# Altium PCB Capybara.PcbDoc (part 1 of 5)
Units mil, origin at the board's own origin, x right, y up, seen from the top; angles counter-clockwise.
Board outline 2270 x 2270 mil, 4 copper layers (Top Layer, GND, Signal, Bottom Layer), stack 61.8 mil thick; 394 components, 234 nets, 1155 pads, 211 vias.
Unrouted connection lines stored in the file: 4.
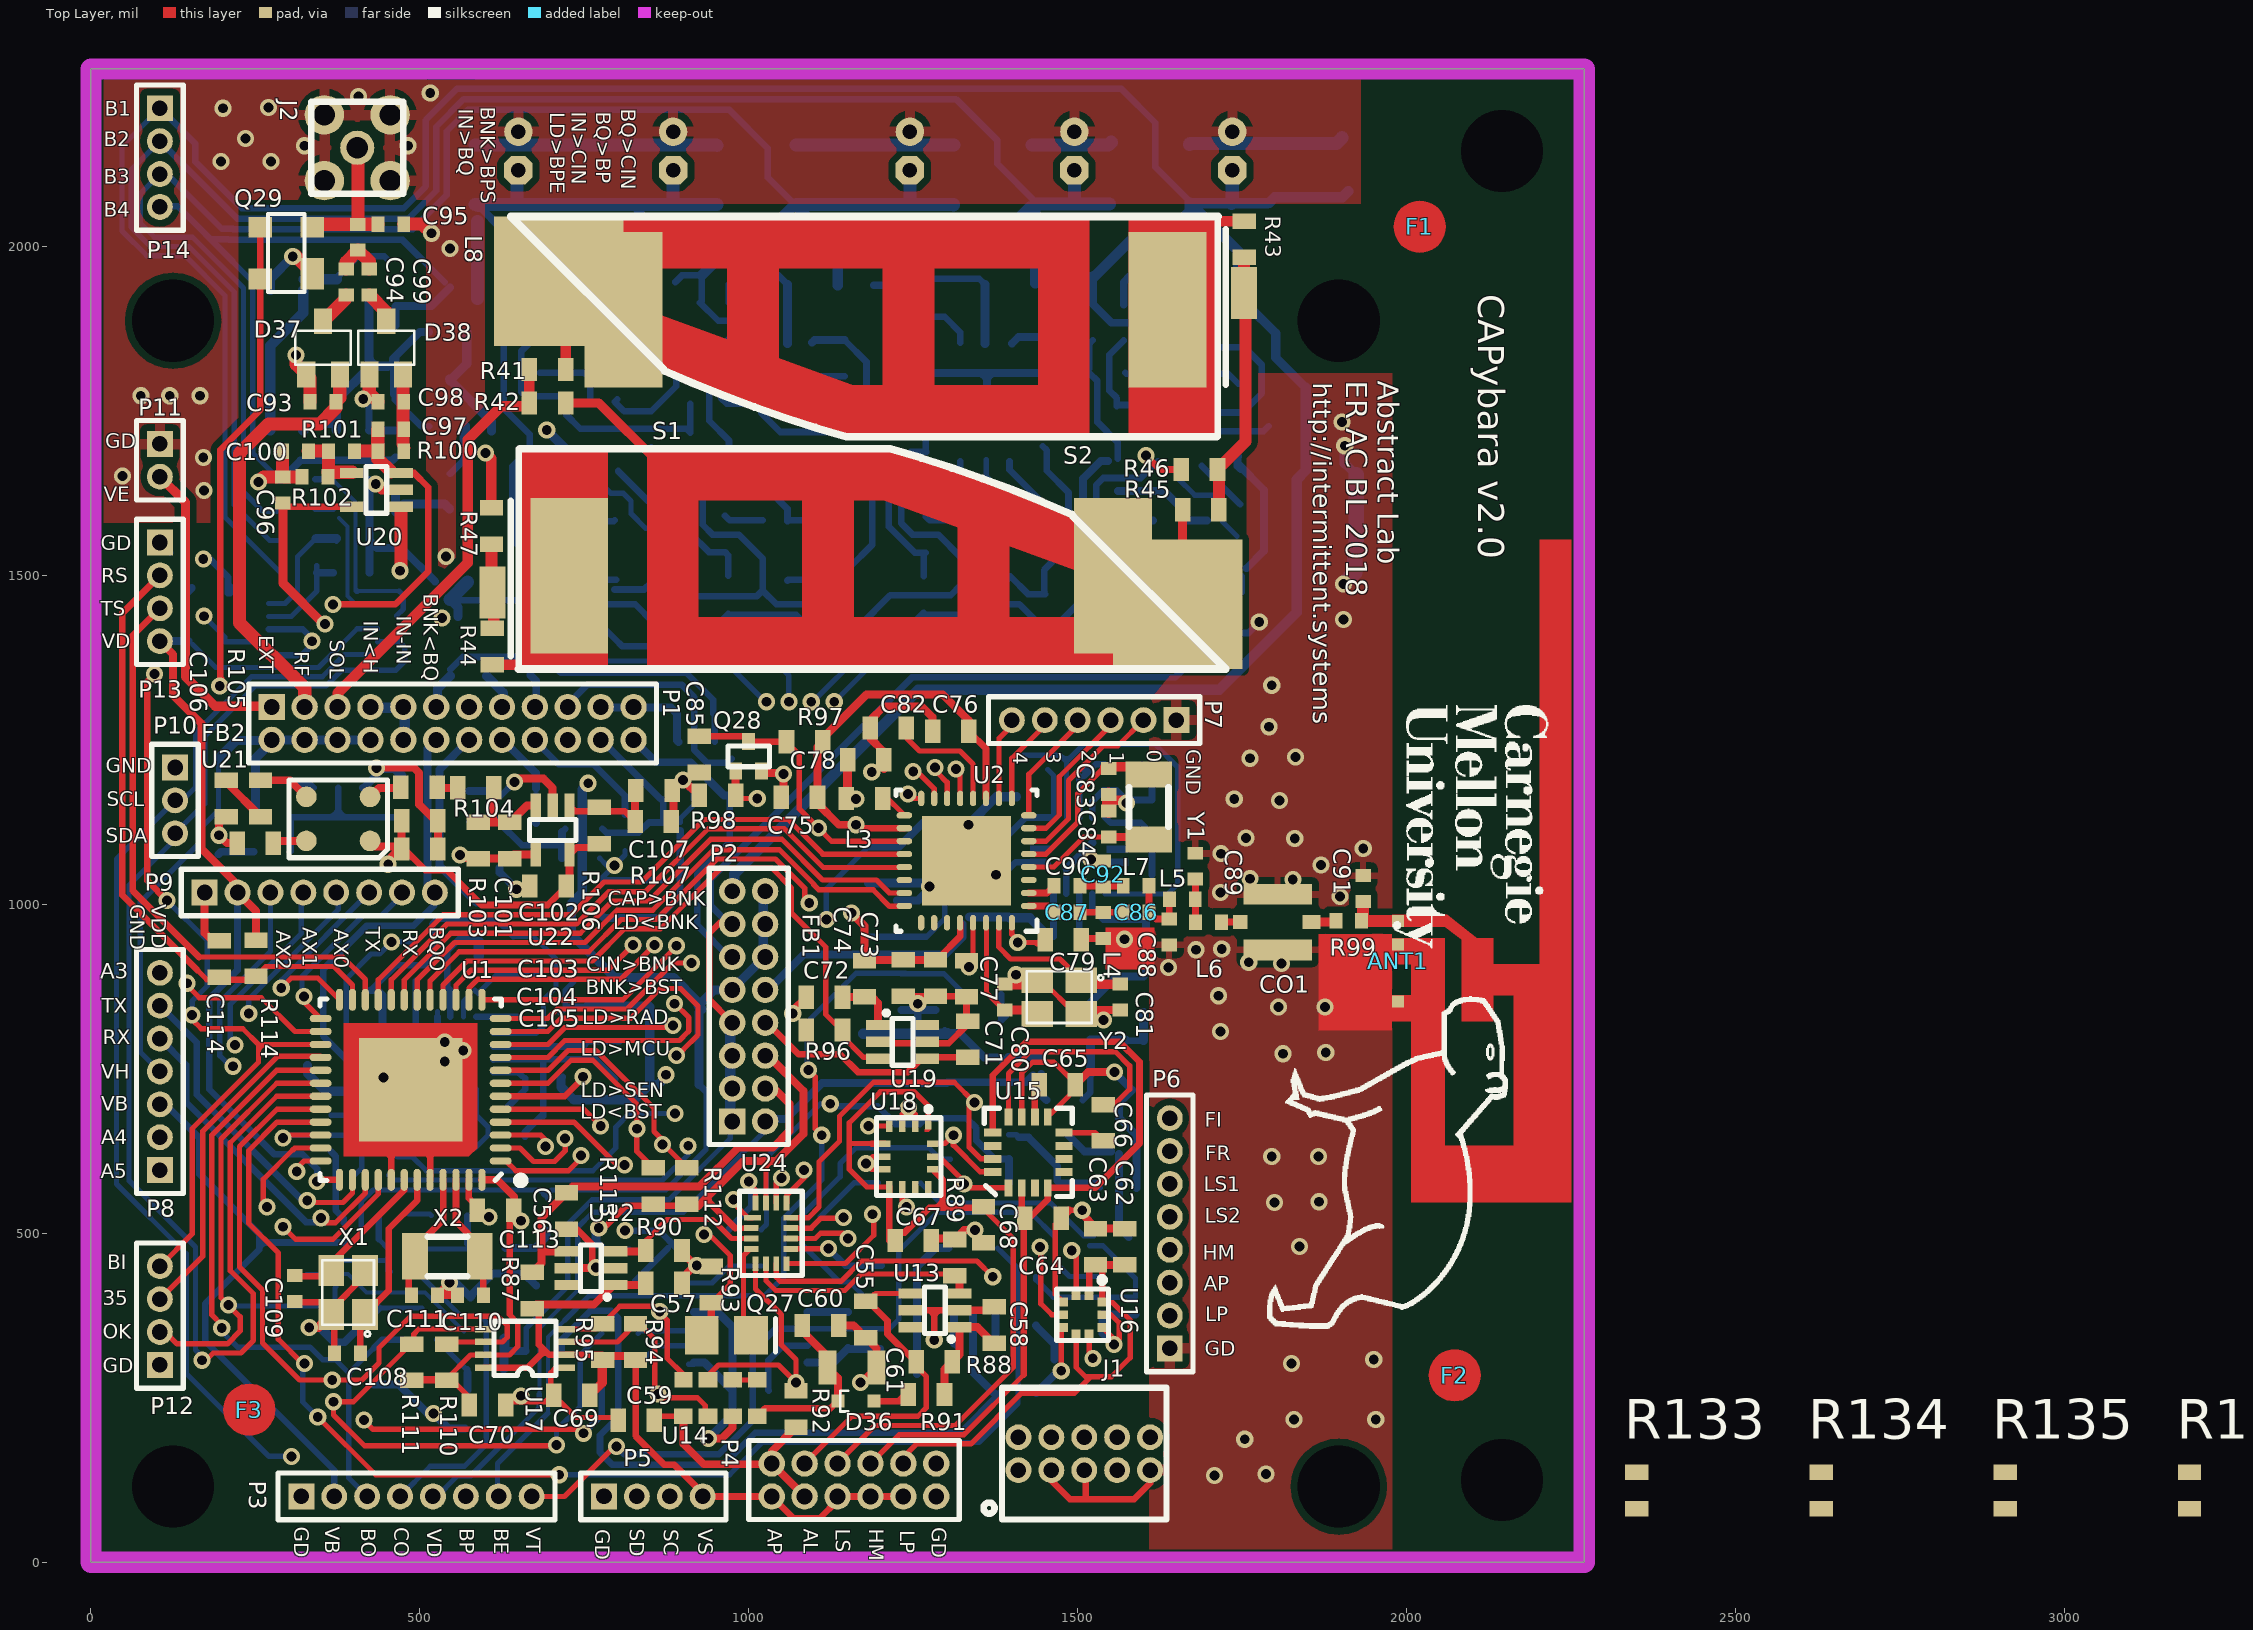
[diagram p0: Top Layer view]
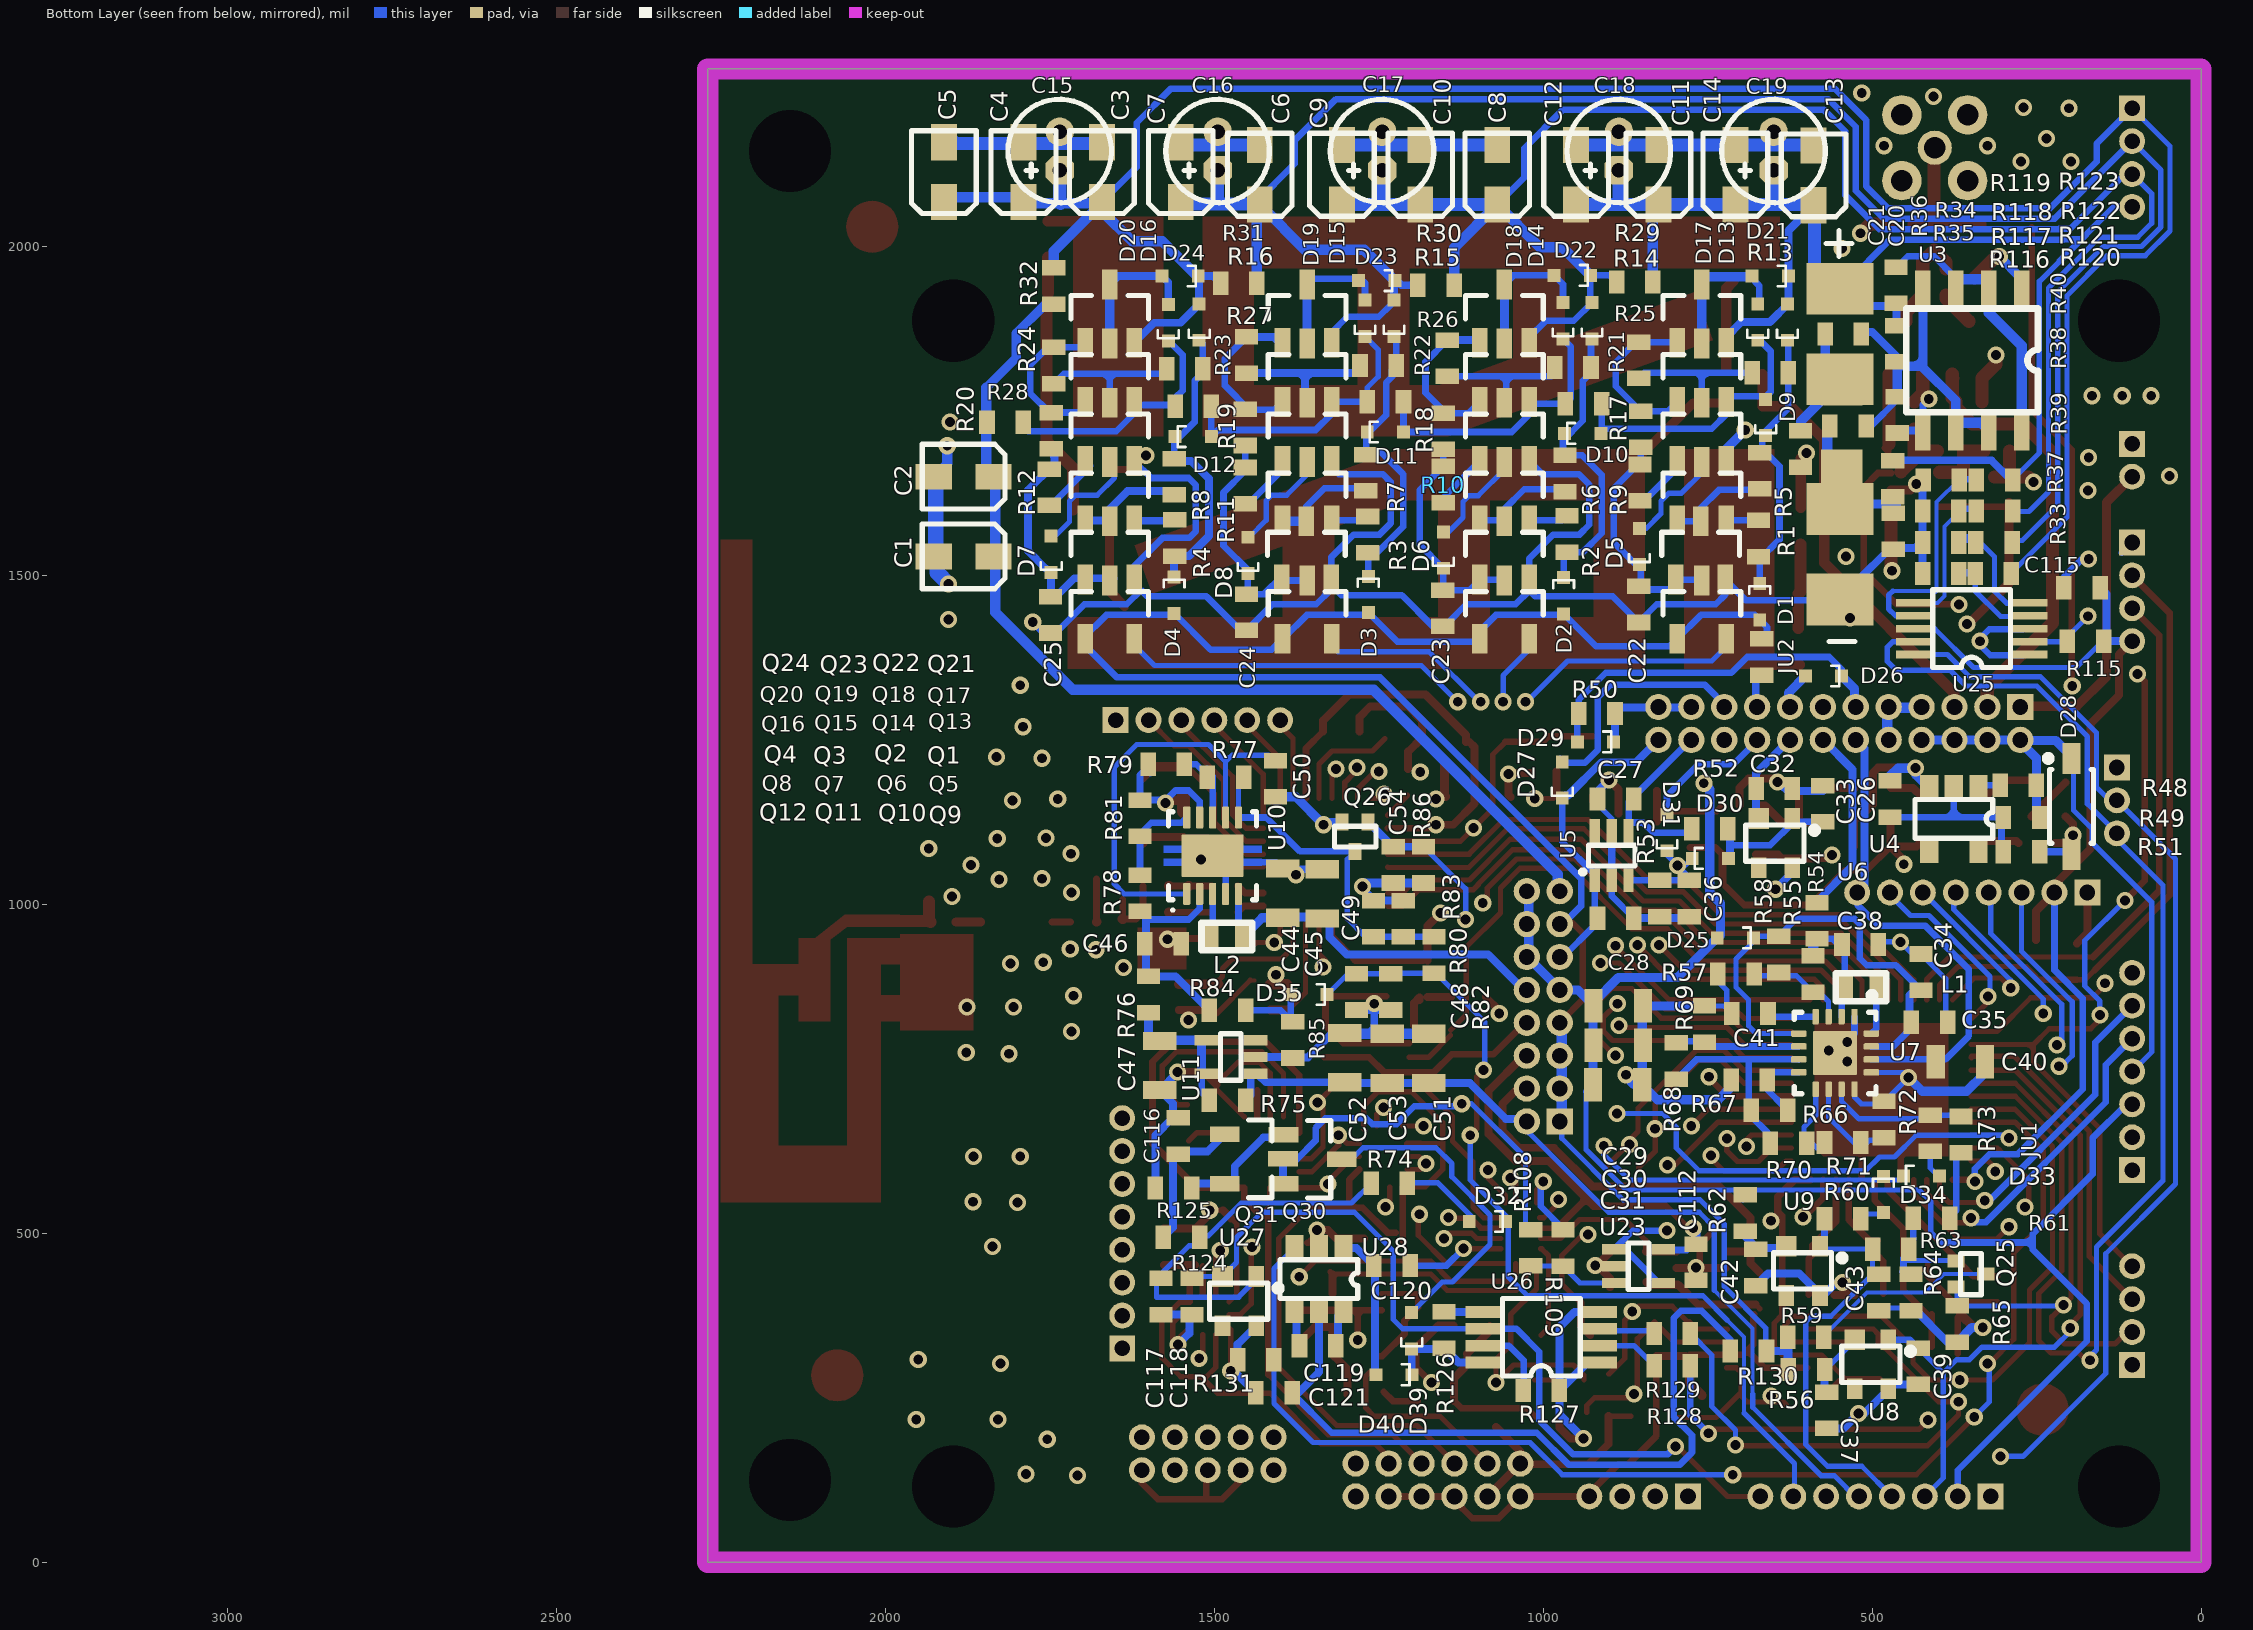
[diagram p1: Bottom Layer view, seen from below]
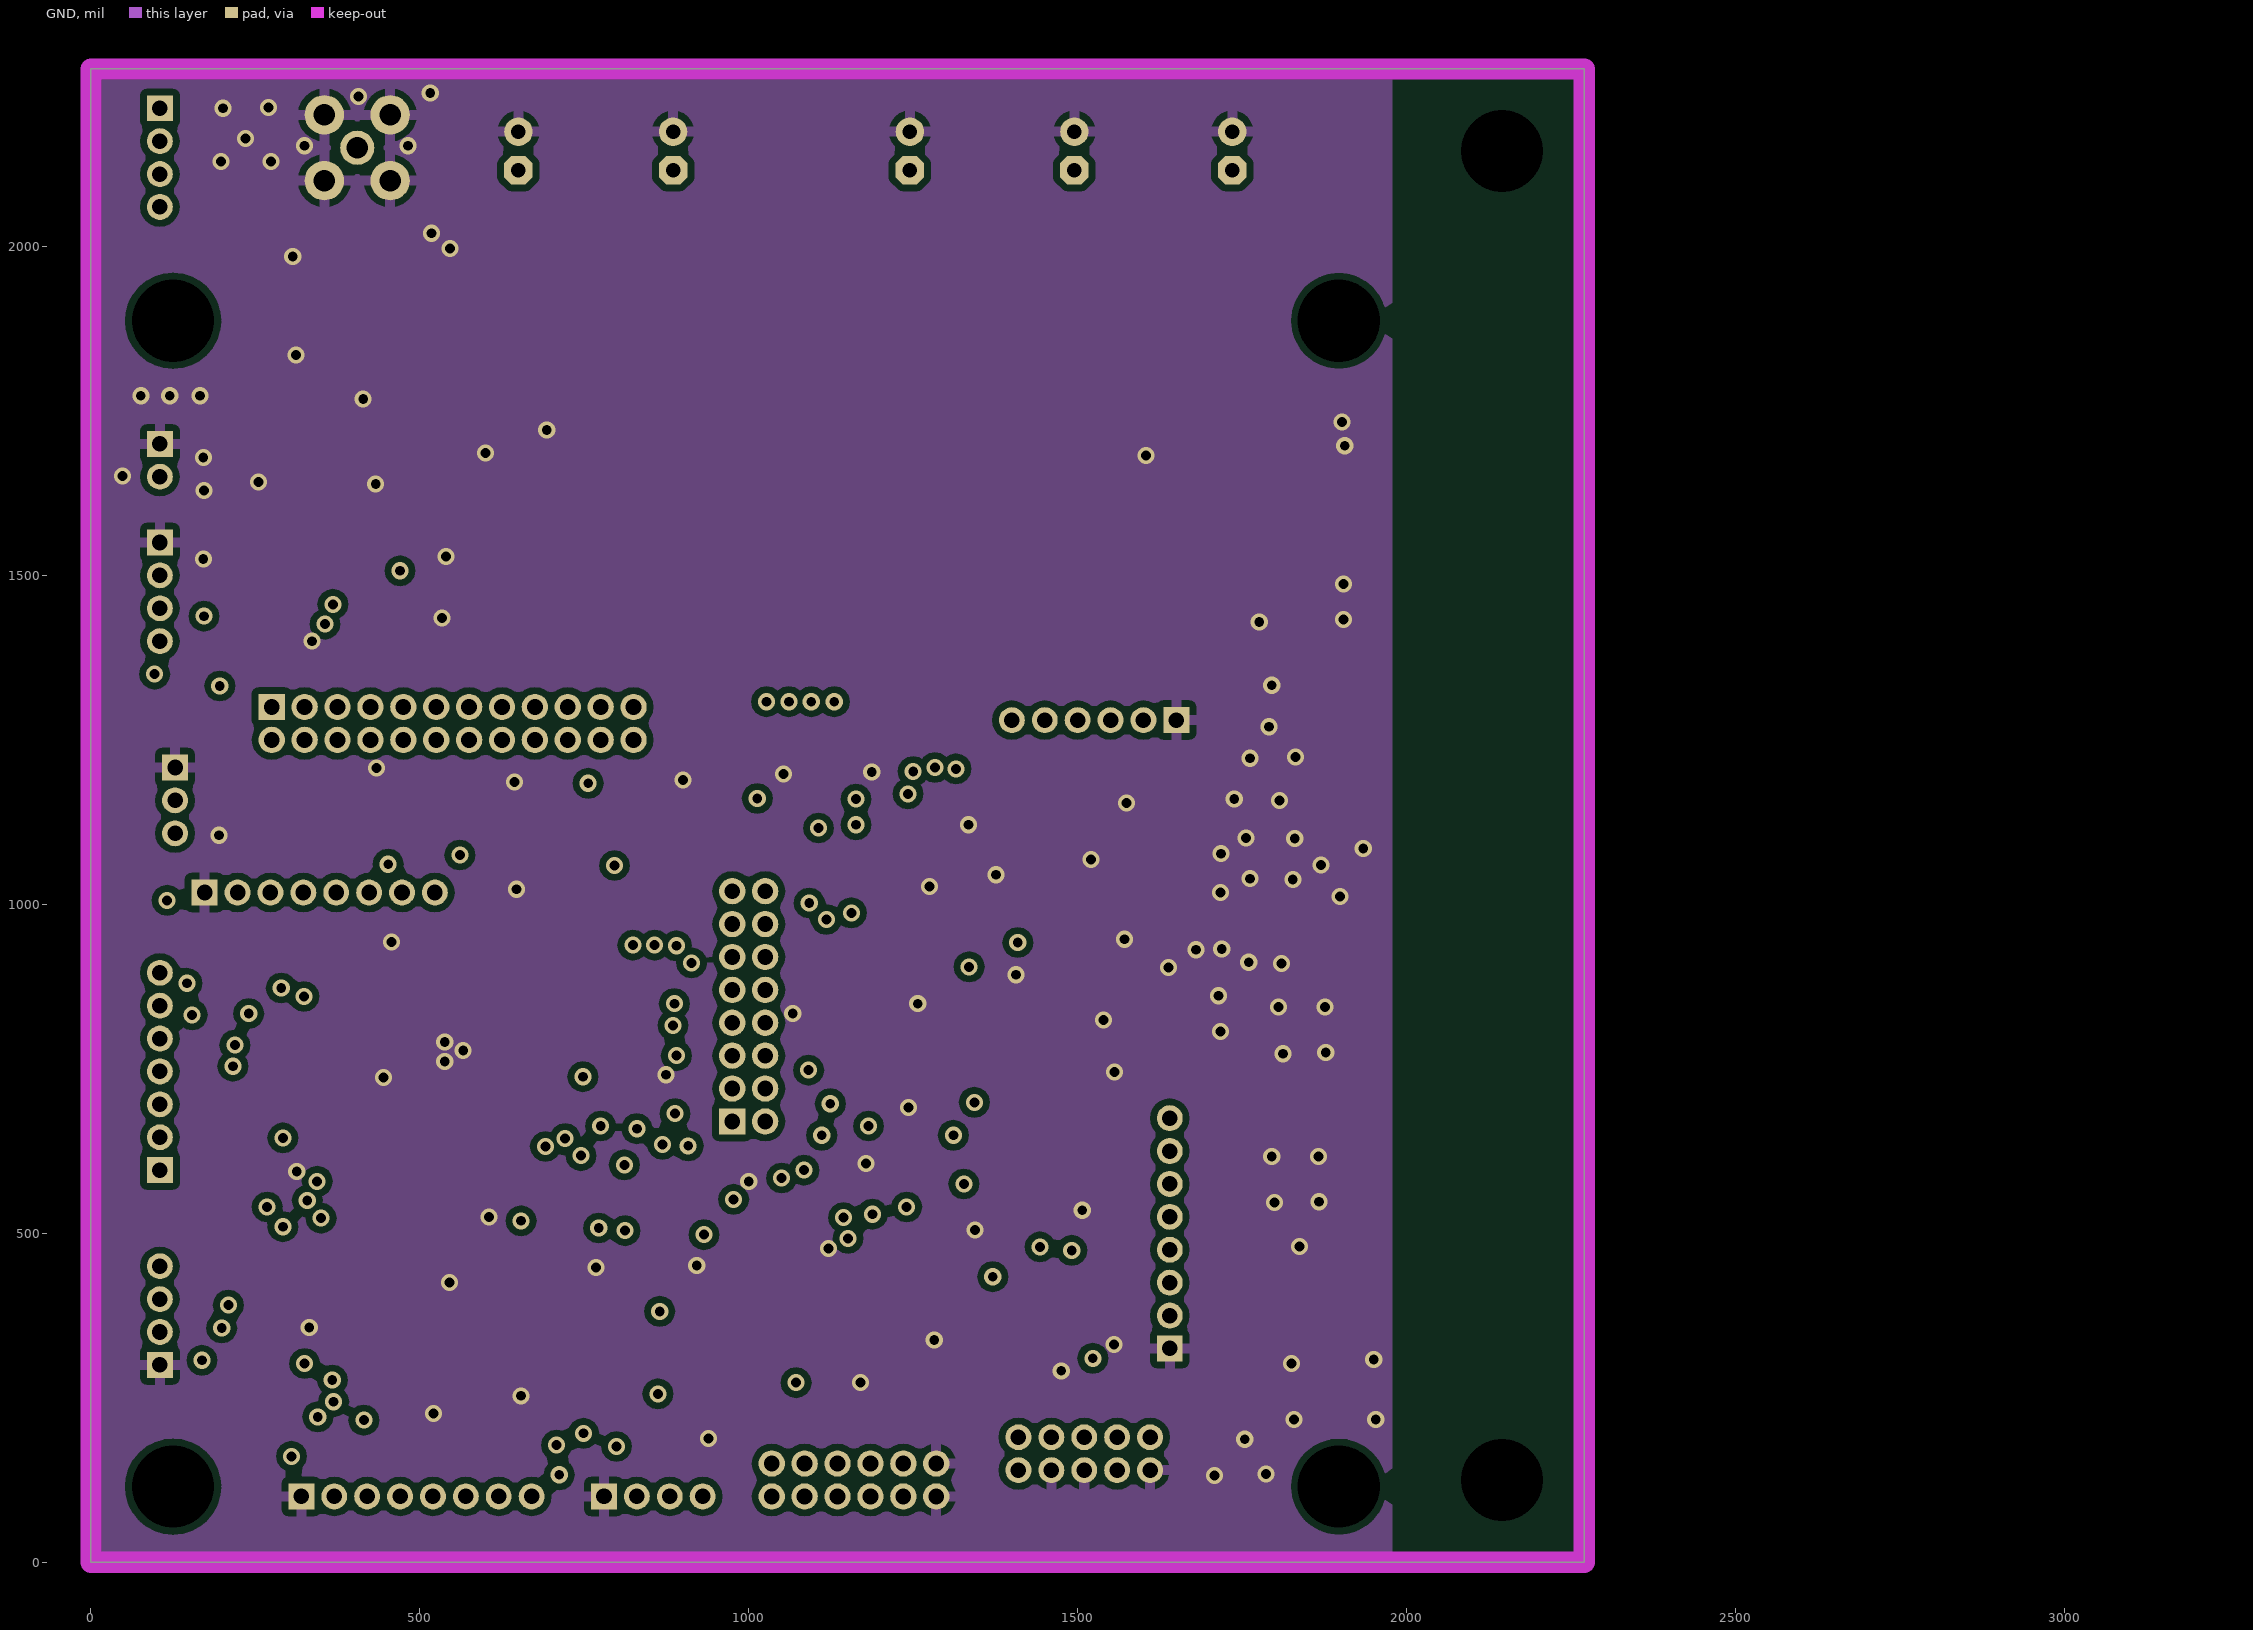
[diagram p2: GND]
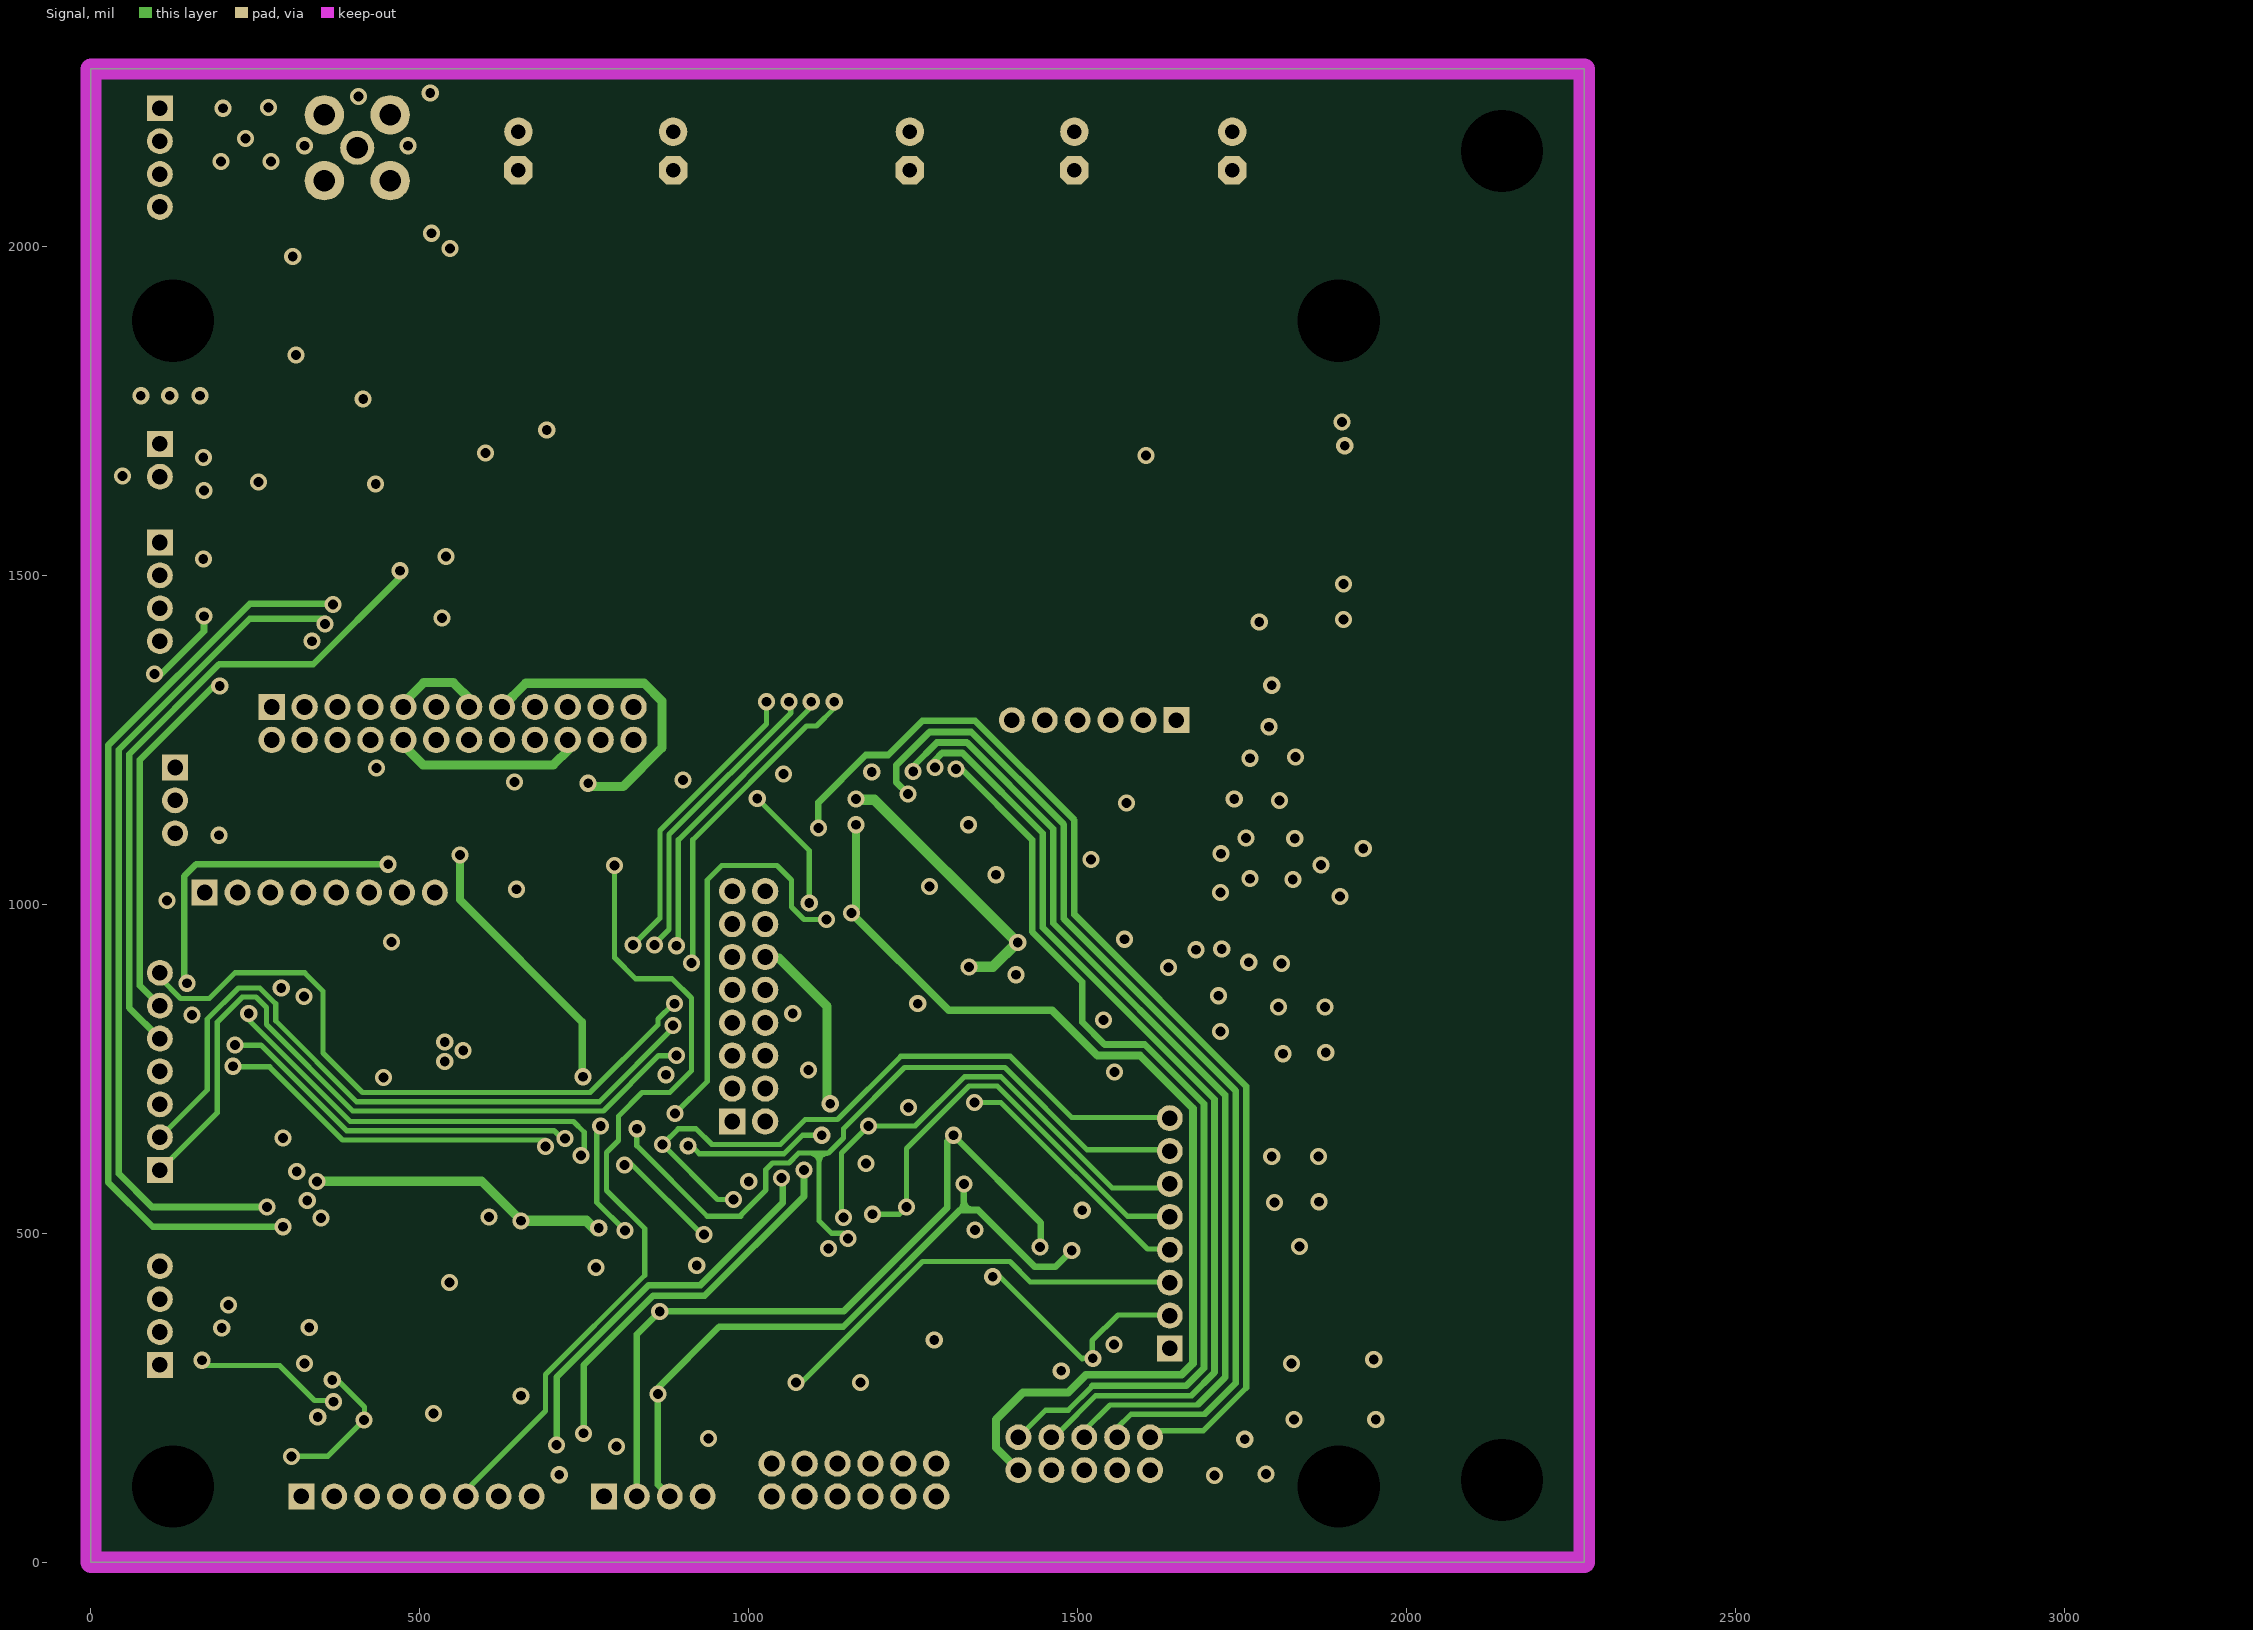
[diagram p3: Signal]

## Layer stack, top to bottom
Top Solder: solder mask 1, Solder Resist, Dk 3.5
Top Layer: signal copper 1.4
Dielectric 1: prepreg 14.1, FR408, Dk 4.5
GND: signal copper 1.4
Dielectric 3: core 28, FR408, Dk 4.5
Signal: signal copper 1.4
Dielectric 2: prepreg 14.1, FR408, Dk 4.5
Bottom Layer: signal copper 1.4
Bottom Solder: solder mask 1, Solder Resist, Dk 3.5

## Board outline
0,0 2270,0 2270,2270 0,2270

## Design rules (kind name [scope] priority, off if disabled: settings)
Clearance Clearance_keepout [OnLayer('Keep-Out Layer')] p1: gap=0 ignorepadtopadclearanceinfootprint=TRUE // Clearance for polygon wrt keepout layer
Clearance [InNamedPolygon('GND')] p2: gap=10 ignorepadtopadclearanceinfootprint=TRUE except(0: Arc-Hole Track-Hole SMDPad-Hole THPad-Hole Via-Hole Fill-Hole Poly-Hole Region-Hole Text-Hole)
Clearance "Clearance~Sunstone Circuits" [All] p3: gap=6 ignorepadtopadclearanceinfootprint=FALSE except(0: SMDPad-Hole THPad-Hole Via-Hole Fill-Hole Poly-Hole Region-Hole Text-Hole; 10: Arc-Hole Track-Hole) // Sunstone Circuits Minimum Clearance Rule (MLB~4&6 Layer Designs)
ComponentClearance OverlappingCapFootprint [InComponent('C20') vs InComponent('C21')] p1: gap=-10 collisioncheckmode=3 verticalgap=10 showdistances=FALSE
ComponentClearance OverlappingSingleCapFootprint [InComponent('C113')  OR InComponent('C114') OR InComponent('C118') OR InComponent('C119') OR InComponent('C121') vs InComponent('C61') OR InComponent('C62') OR InComponent('C63') OR InComponent('C68')  OR InComponent('C65') OR InComponent('C66') OR InComponent('C60') OR InComponent('C69') OR InComponent('C70') OR InComponent('C71') OR InComponent('C83') OR InComponent('C84') OR InComponent('C67') OR InComponent('C64')] p2: gap=-20 collisioncheckmode=3 verticalgap=-100 showdistances=FALSE
ComponentClearance TestPointClearance [InComponent('T*')] p3: gap=10 collisioncheckmode=3 verticalgap=10 showdistances=FALSE
ComponentClearance ComponentClearance_2 [All] p4: gap=10 collisioncheckmode=3 verticalgap=10 showdistances=FALSE
HoleSize "HoleSize~Sunstone Circuits" [All] p1: absolutevalues=TRUE maxlimit=251 minlimit=10 maxpercent=80.000 minpercent=20.000 // Sunstone Circuits Hole Size Rule (MLB~4&6 Layer Designs)
HoleSize Testpoint [All] p2: absolutevalues=TRUE maxlimit=100 minlimit=1 maxpercent=80.000 minpercent=20.000
HoleSize TestPointUsage [All] p3: absolutevalues=TRUE maxlimit=100 minlimit=1 maxpercent=80.000 minpercent=20.000
HoleSize [All] p4: absolutevalues=TRUE maxlimit=100 minlimit=1 maxpercent=80.000 minpercent=20.000
MinimumAnnularRing "MinimumAnnularRing~Sunstone Circuits" [All] p1: minimumring=5 // Sunstone Circuits Minimum Annular Ring (MLB~4&6 Layer Designs)
MinimumSolderMaskSliver [NOT InComponent('U*')] p1: minsoldermaskwidth=4
PlaneClearance "PlaneClearance~Sunstone Circuits" [All] p1: clearance=18 // Sunstone Circuits Power Plane Clearance Rule (MLB~4&6 Layer Designs)
PlaneClearance [All] p2 off: clearance=16
PlaneConnect "PlaneConnect~Sunstone Circuits" [IsVia AND InNet('GND')] p1: planeconnectstyle=Direct reliefexpansion=10 reliefentries=4 reliefconductorwidth=8 reliefairgap=10 // Sunstone Circuits Power Plane Connect Rule (MLB~4&6 Layer Designs)
PlaneConnect [All] p2: planeconnectstyle=Relief reliefexpansion=8 reliefentries=4 reliefconductorwidth=18 reliefairgap=8
PolygonConnect [All] p1: thpad.connectstyle=Relief thpad.reliefconductorwidth=16 thpad.reliefentries=4 thpad.polygonreliefangle="90 Angle" thpad.airgapwidth=10 smdpad.connectstyle=Relief smdpad.reliefconductorwidth=10 smdpad.reliefentries=4 smdpad.polygonreliefangle="90 Angle" smdpad.airgapwidth=10 via.connectstyle=Direct via.reliefconductorwidth=10 via.reliefentries=4 via.polygonreliefangle="90 Angle" via.airgapwidth=10
PolygonConnect "PolygonConnect~Sunstone Circuits" [IsVia AND InNet('GND')] p2 off: connectstyle=Direct reliefconductorwidth=8 reliefentries=4 polygonreliefangle="90 Angle" airgapwidth=10 // Sunstone Circuits Polygon Connect Style (MLB~4&6 Layer Designs)
RoutingVias "RoutingVias~Sunstone Circuits" [All] p1: holewidth=16 width=30 viastyle="Through Hole" minholewidth=8 minwidth=24 maxholewidth=100 maxwidth=100 // Sunstone Circuits Routing Vias Rule (MLB~4&6 Layer Designs)
RoutingVias [All] p2: holewidth=28 width=50 viastyle="Through Hole" minholewidth=28 minwidth=50 maxholewidth=28 maxwidth=50
ShortCircuit "ShortCircuit~Sunstone Circuits" [All] p1: allowed=FALSE // Sunstone Circuits Short Circuit Rule~Do Not Allow (MLB~4&6 Layer Designs)
ShortCircuit [All] p2: allowed=FALSE
SilkToSilkClearance [All] p1 off: silktosilkclearance=10
SilkToSolderMaskClearance [IsPad] p1 off: minsilkscreentomaskgap=10 clearancetoexposedcopper=TRUE
SolderMaskExpansion "SolderMaskExpansion~Sunstone Circuits" [All] p1: expansion=3 // Sunstone Circuits Solder Mask Expansion Rule (MLB~4&6 Layer Designs)
SolderMaskExpansion [All] p2: expansion=4
ViasUnderSMD "ViasUnderSMD~Sunstone Circuits" [All] p1: allowed=FALSE // Sunstone Circuits Vias Under SMD~Do Not Allow (MLB~4&6 Layer Designs)
Width "Width~Sunstone Circuits" [All] p1: maxlimit=100 minlimit=6 preferedwidth=15 toplayer_maxwidth=32 toplayer_prefwidth=10 midlayer2_maxwidth=32 midlayer2_prefwidth=10 bottomlayer_maxwidth=32 bottomlayer_prefwidth=10 minimp=50.000000 maximp=50.000000 favimp=50.000000 // Sunstone Circuits Minimum Width Rule (MLB~4&6 Layer Designs)
Width [All] p2 off: maxlimit=65.97 minlimit=8 preferedwidth=65.97 toplayer_minwidth=20.2 toplayer_maxwidth=20.2 toplayer_prefwidth=20.2 midlayer1_maxwidth=32 midlayer1_prefwidth=10 midlayer2_minwidth=41.84 midlayer2_maxwidth=41.84 midlayer2_prefwidth=41.84 bottomlayer_minwidth=65.97 impedancedriven=TRUE minimp=50.000000 maximp=50.000000 favimp=50.000000
22 further rules are at their usual default settings.

## Classes and differential pairs
component class Capybara: F1 F2 F3 JU1 JU2 P1 P8 P9 P10 P11
component class U_CapBank: C1 C2 C3 C4 C5 C6 C7 C8 C9 C10 C11 C12 C13 C14 C15 C16 C17 C18 C19 C22 C23 C24 C25 C? D1 D2 D3 D4 D5 D6 D7 D8 D9 D10 D11 D12 D13 D14 D15 D16 D17 D18 D19 D20 D21 D22 D23 D24 Q1 Q2 Q3 Q4 Q5 Q6 Q7 Q8 Q9 Q10 Q11 Q12 Q13 Q14 Q15 Q16 Q17 Q18 Q19 Q20 Q21 Q22 Q23 Q24 R1 R2 R3 R4 R5 R6 R7 R8 R9 R10 R11 R12 R13 R14 R15 R16 R17 R18 R19 R20 R21 R22 R23 R24 R25 R26 R27 R28 R29 R30 R31 R32 R132 R133 R134 R135
component class U_Radio: 1 ANT1 C71 C72 C73 C74 C75 C76 C77 C78 C79 C80 C81 C82 C83 C84 C85 C86 C87 C88 C89 C90 C91 C92 CO1 FB1 FL1 J1 L3 L4 L5 L6 L7 P7 Q28 R96 R97 R98 R99 U2 U19 Y1 Y2
component class U_Power: C26 C27 C28 C29 C30 C31 C32 C33 C34 C35 C36 C37 C38 C39 C40 C41 C42 C43 C44 C45 C46 C47 C48 C49 C50 C51 C52 C53 C54 D25 D26 D27 D28 D29 D30 D31 D32 D33 D34 D35 L1 L2 P2 P3 P26 Q25 Q26 R48 R49 R50 R51 R52 R53 R54 R55 R56 R57 R58 R59 R60 R61 R62 R63 R64 R65 R66 R67 R68 R69 R70 R71 R72 R73 R74 R75 R76 R77 R78 R79 R80 R81 R82 R83 R84 R85 R86 U4 U5 U6 U7 U8 U9 U10 U11
component class U_Sensors: C55 C56 C57 C58 C59 C60 C61 C62 C63 C64 C65 C66 C67 C68 C69 C70 D36 P4 P5 P6 Q27 R87 R88 R89 R90 R91 R92 R93 R94 R95 U12 U13 U14 U15 U16 U17 U18
component class U_VtopControl: C116 C117 C118 C119 C120 C121 D39 D40 Q30 Q31 R124 R125 R126 R127 R128 R129 R130 R131 U26 U27 U28
component class U_MCU: C108 C109 C110 C111 C112 C113 C114 P12 P13 R108 R109 R110 R111 R112 R113 R114 U1 U23 U24 X1 X2
component class U_Harvester_RF: C93 C94 C95 C96 C97 C98 C99 C100 D37 D38 J2 L8 Q29 R100 R101 R102 U20
component class Harvester_Solar: R41 R42 R43 R44 R45 R46 R47 S1 S2
component class U_Sensors_Mic: C101 C102 C103 C104 C105 C106 C107 FB2 R103 R104 R105 R106 R107 U21 U22
component class U_CapBank_Introspection: C115 P14 R115 R116 R117 R118 R119 R120 R121 R122 R123 U25
component class U_CapBank_Supercaps: C20 C21 R33 R34 R35 R36 R37 R38 R39 R40 U3

## Components (designator, comment, footprint, x,y, rotation, side; value= is the part's Value field where it differs from the comment)
ANT1 "2.4GHz_ANT" IIF_INV 1977.94,547.44 r270 top net-tie
C1 "Cap - Polarized" CAP_CPH3225A 1881,1529 r0 bottom
C2 "Cap - Polarized" CAP_CPH3225A 1881,1650 r0 bottom
C3 "Cap - Polarized" CAP_CPH3225A 1671,2113 r90 bottom value=7.5mF
C4 "Cap - Polarized" CAP_CPH3225A 1790,2113 r90 bottom value=7.5mF
C5 "Cap - Polarized" CAP_CPH3225A 1911,2113 r90 bottom value=7.5mF
C6 "Cap - Polarized" CAP_CPH3225A 1431,2109 r90 bottom value=7.5mF
C7 "Cap - Polarized" CAP_CPH3225A 1551,2113 r90 bottom value=7.5mF
C8 "Cap - Polarized" CAP_CPH3225A 1070,2109 r90 bottom value=7.5mF
C9 "Cap - Polarized" CAP_CPH3225A 1306,2109 r90 bottom value=7.5mF
C10 "Cap - Polarized" CAP_CPH3225A 1187,2109 r90 bottom value=7.5mF
C11 "Cap - Polarized" CAP_CPH3225A 825,2109 r90 bottom value=7.5mF
C12 "Cap - Polarized" CAP_CPH3225A 950,2109 r90 bottom value=7.5mF
C13 "Cap - Polarized" CAP_CPH3225A 589,2108 r90 bottom value=7.5mF
C14 "Cap - Polarized" CAP_CPH3225A 708,2109 r90 bottom value=7.5mF
C15 "304DCN2R7SCBB" CAP_ILLINOIS_DCN 1735,2145 r90 bottom value=300mF
C16 "304DCN2R7SCBB" CAP_ILLINOIS_DCN 1495,2145 r90 bottom value=300mF
C17 "304DCN2R7SCBB" CAP_ILLINOIS_DCN 1245,2145 r90 bottom value=300mF
C18 "304DCN2R7SCBB" CAP_ILLINOIS_DCN 885,2145 r90 bottom value=300mF
C19 "304DCN2R7SCBB" CAP_ILLINOIS_DCN 650,2145 r90 bottom value=300mF
C20 "SUPERCAP_DUAL_SERIES" SUPERCAP_DMT 988.91,1796 r180 bottom value=220mF
C21 "SUPERCAP_DUAL" SUPERCAP_DMHA14R 1060.81,1699.57 r180 bottom value=35mF
C22 "Cap" 0603 855,1456 r90 bottom value=1uF
C23 "Cap" 0603 1153,1450 r90 bottom value=1uF
C24 "Cap" 0603 1451,1444 r90 bottom value=1uF
C25 "Cap" 0603 1749,1440 r90 bottom value=1uF
C26 "Cap" 0603 473,1160 r270 bottom value=0.1uF
C27 "Cap" 0603 890,1160 r180 bottom value=2.2uF
C28 "Cap" 0603 890,979 r0 bottom value=2.2uF
C29 "Cap" 0805 886,846 r0 bottom value=100uF
C30 "Cap" 0805 886,786 r0 bottom value=100uF
C31 "Cap" 0805 887,726 r0 bottom value=100uF
C32 "Cap" 0603 649,1176 r0 bottom value=2.2uF
C33 "Cap" 0603 575,1153 r270 bottom value=0.1uF
C34 "Cap" 0603 426,897 r270 bottom value=4.7uF
C35 "Cap" 0603 413,821 r0 bottom value=0.1uF
C36 "Cap" 0603 778,1009 r90 bottom value=0.22uF
C37 "Cap" 0603 569,231 r90 bottom value=2.2uF
C38 "Cap" 0603 518.4,939 r180 bottom value=47uF
C39 "Cap" 0603 430,298 r90 bottom value=0.1uF
C40 "Cap" 0805 366,761 r0 bottom value=100uF
C41 "Cap" 0603 686,834 r180 bottom value=0.01uF
C42 "Cap" 0603 677,448 r90 bottom value=2.2uF
C43 "Cap" 0603 490,410 r90 bottom value=0.1uF
C44 "Cap" 0805 1396,1017 r270 bottom value=100uF
C45 "Cap" 0805 1336,1016 r270 bottom value=100uF
C46 "Cap" 0603 1578,940 r0 bottom value=10uF
C47 "Cap" 0805 1583,755 r90 bottom value=10uF
C48 "Cap" 0603 1284,867 r270 bottom value=TBD
C49 "Cap" 0603 1258,978 r270 bottom value=0.1uF
C50 "Cap" 0603 1407,1191 r90 bottom value=0.1uF
C51 "Cap" 0805 1174,766 r270 bottom value=100uF
C52 "Cap" 0805 1302,767 r270 bottom value=100uF
C53 "Cap" 0805 1237,766 r270 bottom value=100uF
C54 "Cap" 0603 1228,1060 r90 bottom value=0.02uF
C55 "Cap" 0603 1178,369 r90 top value=2.2uF
C56 "Cap" 0603 723,534 r90 top value=2.2uF
C57 "Cap" 0603 871,424 r180 top value=2.2uF
C58 "Cap" 0603 1373,360.56 r270 top value=2.2uF
C59 "Cap" 0603 829,216 r0 top value=1uF
C60 "Cap" 0603 1109,360 r180 top value=1uF
C61 "Cap - Polarized" 0805 1157,296 r0 top value=100uF
C62 "Cap" 0603 1571.4,479.6 r90 top value=0.1uF
C63 "Cap" 0603 1527.2,479.5 r90 top value=4.7uF
C64 "Cap" 0603 1447.2,522.8 r0 top value=0.1uF
C65 "Cap" 0603 1469,726 r0 top value=4.7uF
C66 "Cap" 0603 1539,668 r90 top value=0.22uF
C67 "Cap" 0603 1250,489 r0 top value=0.1uF
C68 "Cap" 0603 1357,513 r270 top value=0.1uF
C69 "Cap" 0603 731,254 r0 top value=100pF
C70 "Cap" 0603 603,239 r180 top value=100pF
C71 "Cap" 0603 1333,795 r270 top value=2.2uF
C72 "Cap" 0603 1115,859 r0 top value=2.2uF
C73 "Cap" 0603 1284,888 r90 top value=10uF
C74 "Cap" 0603 1235,888 r90 top value=0.1uF
C75 "Cap" 0603 1077,1163 r0 top value=0.1uF
C76 "Cap" 0603 1307,1263 r0 top value=0.1uF
C77 "Cap" 0603 1331,887 r90 top value=0.1uF
C78 "Cap" 0603 1177.8,1220 r180 top value=0.1uF
C79 "Cap" 0603 1478,946 r180 top value=10uF
C80 "Cap" 0402 1389,859 r270 top value=10pF
C81 "Cap" 0402 1565,859 r270 top value=10pF
C82 "Cap" 0603 1212,1268 r0 top value=1uF
C83 "Cap" 0402 1547,1187 r90 top value=6pF
C84 "Cap" 0402 1547,1122 r270 top value=6pF
C85 "Cap" 0603 925,1228 r270 top value=2.2nF
C86 "Cap" 0402 1589,988 r180 top value=1pF
C87 "Cap" 0402 1484,988 r180 top value=1pF
C88 "Cap" 0402 1639,958 r90 top
C89 "Cap" 0402 1679,1058 r270 top
C90 "Cap" 0402 1484,1028 r180 top value=1pF
C91 "Cap" 0402 1934,1024 r270 top value=0.5pF
C92 "Cap" 0402 1539,1046 r270 top value=1pF
C93 "Cap" 0402 353,1764 r180 top value=33pF
C94 "Cap" 0402 388,1946 r270 top value=33pF
C95 "Cap" 0402 456,2034 r180 top value=2.2pF
C96 "Cap" 0402 292,1630 r90 top value=10000pF
C97 "Cap" 0402 456,1722 r180 top value=33pF
C98 "Cap" 0402 456,1764 r180 top value=10pF
C99 "Cap" 0402 423,1946 r270 top value=1pF
C100 "Cap" 0402 311,1689 r180 top value=1000pF
C101 "Cap" 0603 637,1097 r270 top value=100pF
C102 "Cap" 0603 695,1028 r0 top value=0.1uF
C103 "Cap" 0603 499,1178 r0 top value=4.7uF
C104 "Cap" 0603 500,1127 r180 top value=2.2uF
C105 "Cap" 0603 500,1084 r180 top value=100pF
C106 "Cap" 0603 206,1161 r90 top value=0.47uF
C107 "Cap" 0603 856,1173 r180 top value=1uF
C108 "Cap" 0402 390,318 r180 top value=8pF
C109 "Cap" 0402 310,416 r90 top value=8pF
C110 "Cap" 0402 577,406 r0 top value=4pF
C111 "Cap" 0402 507,406 r0 top value=4pF
C112 "Cap" 0603 768,456 r270 bottom value=0.1uF
C113 "Cap" 0603 615,535 r180 top value=0.1uF
C114 "Cap" 0603 195,917 r90 top value=2.2nF
C115 "Cap" 0603 181,1481 r180 bottom value=0.1uF
C116 "Cap" 0603 1555,648 r270 bottom value=0.047uF
C117 "Cap" 0603 1581,404 r90 bottom value=0.1uF
C118 "Cap" 0603 1534,404 r90 bottom value=2.2uF
C119 "Cap" 0603 1343,329.24 r180 bottom value=0.22uF
C120 "Cap" 0603 1230,451 r0 bottom value=2.2uF
C121 "Cap" 0603 1409.44,257.44 r180 bottom value=2.2uF
CO1 "COAX_SMALL" "COAX SMALL_V2" 1807,973 r270 top
D1 "Diode" SOD-523 671,1460 r180 bottom
D2 "Diode" SOD-523 969,1469 r180 bottom
D3 "Diode" SOD-523 1266,1471 r180 bottom
D4 "Diode" SOD-523 1561,1469.96 r180 bottom
D5 "Diode" SOD-523 854,1544 r0 bottom
D6 "Diode" SOD-523 1152,1538.44 r0 bottom
D7 "Diode" SOD-523 1748,1532 r0 bottom
D8 "Diode" SOD-523 1449,1530.44 r0 bottom
D9 "Diode" SOD-523 662,1740 r0 bottom
D10 "Diode" SOD-523 940,1716 r90 bottom
D11 "Diode" SOD-523 1240,1718 r90 bottom
D12 "Diode" SOD-523 1532,1711 r90 bottom
D13 "Diode" SOD-523 629,1885 r0 bottom
D14 "Diode" SOD-523 926,1887 r0 bottom
D15 "Diode" SOD-523 1227,1891 r0 bottom
D16 "Diode" SOD-523 1523,1885 r0 bottom
D17 "Diode" SOD-523 674,1885 r0 bottom
D18 "Diode" SOD-523 970,1887 r0 bottom
D19 "Diode" SOD-523 1271,1891 r0 bottom
D20 "Diode" SOD-523 1570,1884 r0 bottom
D21 "Diode" SOD-523 655,1955 r270 bottom
D22 "Diode" SOD-523 956,1956 r270 bottom
D23 "Diode" SOD-523 1253,1948 r270 bottom
D24 "Diode" SOD-523 1552,1955 r270 bottom
D25 "Diode" SOD-523 708,949 r270 bottom
D26 "Diode" SOD-523 574,1347 r270 bottom
D27 "Diode" SOD-523 971.2,1189 r0 bottom
D28 "3.0V" DIOD-SOD-123-2_V 197,1149 r90 bottom
D29 "Diode" SOD-523 920.56,1247 r270 bottom
D30 "Diode" SOD-523 746,1070 r90 bottom
D31 "Diode" SOD-523 812,1109 r0 bottom
D32 "Diode" SOD-523 1085,518 r270 bottom
D33 "Diode" SOD-523 425,587 r90 bottom
D34 "Diode" SOD-523 483,559 r180 bottom
D35 "Diode" SOD-523 1356,863 r270 bottom
D36 "Diode" SOD-523 1163,245 r90 top
D37 "HSMS-285C" "SOT-323, HSMS-285C" 353,1846 r0 top
D38 "HSMS-285C" "SOT-323, HSMS-285C" 449,1846 r0 top
D39 "Diode" SOD-523 1200,352 r0 bottom
D40 "Diode" SOD-523 1227,285 r270 bottom
F1 "FIDUCIAL" FIDUCIAL 2020,2030 r0 top
F2 "FIDUCIAL" FIDUCIAL 2073,284 r0 top
F3 "FIDUCIAL" FIDUCIAL 241,232 r0 top
FB1 "Ferrite Bead" 0603 1176,887 r90 top
FB2 "Ferrite Bead" 0603 250,1093 r0 top
J1 "" JTAG_V3 1510,165 r0 top locked
J2 "MMCX" MMCX-TH 405,2150 r180 top locked
JU1 "JUMPER" JUMPER0603 365,650 r90 bottom
JU2 "JUMPER" JUMPER0603 668,1376 r90 bottom
L1 "" PFL1609 517,874 r180 bottom value=4.7uH
L2 "" PFL1609 1481,951 r0 bottom value=4.7uH
L3 "Ind" 0603 1176,1161 r0 top value=10uH
L4 "Ind" 0402 1539,968 r270 top value=2.4nH
L5 "Ind" 0402 1659,1008 r0 top value=2nH
L6 "Ind" 0402 1699,973 r0 top value=2nH
L7 "Ind" 0402 1589,1028 r0 top value=2.4nH
L8 "Ind" 0402 406,2014 r270 top value=22nH
P1 "JMPHDR_12" MHDR2X12 550,1275 r0 top locked
P2 "JMPHDR_8" MHDR2X8 1000,845 r90 top locked
P3 "MHDR1X8" MHDR1X8 320,100 r0 top
P4 "JMPHDR_6" MHDR2X6 1160,125 r180 top
P5 "MHDR1X4" MHDR1X4 780,100 r0 top
P6 "MHDR1X8" MHDR1X8 1640,325 r90 top locked
P7 "MHDR1X6" MHDR1X6 1650,1280 r180 top locked
P8 "MHDR1X7" MHDR1X7 105,596 r90 top
P9 "MHDR1X8" MHDR1X8 173,1018 r0 top locked
P10 "MHDR1X3" MHDR1X3 128,1208 r270 top locked
P11 "MHDR1X2" MHDR1X2 105,1700 r270 top locked
P12 "Debug" MHDR1X4 105,300 r90 top locked
P13 "APP" MHDR1X4 105,1550 r270 top locked
P14 "" MHDR1X4 105,2210 r270 top locked
Q1 "" "SOT23 - N" 759,1628 r90 bottom value=PMOS
Q2 "" "SOT23 - N" 1059,1628 r90 bottom value=PMOS
Q3 "PMOS" "SOT23 - N" 1359,1628 r90 bottom
Q4 "PMOS" "SOT23 - N" 1659,1628 r90 bottom
Q5 "NMOS" "SOT23 - N" 761,1538 r90 bottom
Q6 "NMOS" "SOT23 - N" 1059,1538 r90 bottom
Q7 "NMOS" "SOT23 - N" 1360,1538 r90 bottom
Q8 "NMOS" "SOT23 - N" 1659,1538 r90 bottom
Q9 "NMOS" "SOT23 - N" 759,1448 r90 bottom
Q10 "NMOS" "SOT23 - N" 1059,1448 r90 bottom
Q11 "NMOS" "SOT23 - N" 1359,1448 r90 bottom
Q12 "NMOS" "SOT23 - N" 1659,1448 r90 bottom
Q13 "NMOS" "SOT23 - N" 759,1718 r90 bottom
Q14 "NMOS" "SOT23 - N" 1059,1718 r90 bottom
Q15 "NMOS" "SOT23 - N" 1359,1718 r90 bottom
Q16 "NMOS" "SOT23 - N" 1659,1718 r90 bottom
Q17 "PMOS" "SOT23 - N" 759,1808 r90 bottom
Q18 "PMOS" "SOT23 - N" 1059,1808 r90 bottom
Q19 "" "SOT23 - N" 1359,1808 r90 bottom value=PMOS
Q20 "" "SOT23 - N" 1659,1808 r90 bottom value=PMOS
Q21 "PMOS" "SOT23 - N" 759,1898 r90 bottom
Q22 "PMOS" "SOT23 - N" 1059,1898 r90 bottom
Q23 "" "SOT23 - N" 1359,1898 r90 bottom value=PMOS
Q24 "" "SOT23 - N" 1659,1898 r90 bottom value=PMOS
Q25 "NMOS" SOT-523-3 349.94,438 r270 bottom
Q26 "NMOS" SOT-523-3 1286,1103 r0 bottom
Q27 "SFH3710" 0805-W 966,345 r180 top
Q28 "NMOS" SOT-523-3 1000,1225 r0 top
Q29 "BF2040" SOT-143 297,1990 r90 top
Q30 "PMOS" "SOT23 - N" 1350.71,612.6 r180 bottom
Q31 "NMOS" "SOT23 - N" 1440,613 r180 bottom
R1 "Res" 0603 673,1556 r270 bottom value=10k
R2 "Res" 0603 964,1563 r270 bottom value=10k
R3 "Res" 0603 1267,1562 r270 bottom value=10k
R4 "Res" 0603 1560,1557 r270 bottom value=10k
R5 "Res" 0603 671,1659 r90 bottom value=100k
R6 "Res" 0603 967,1655 r90 bottom value=100k
R7 "Res" 0603 1270,1656 r90 bottom value=100k
R8 "Res" 0603 1561,1650 r90 bottom value=100k
R9 "DB" 0603 853,1641 r90 bottom value=0
R10 "DB" 0603 1152,1638 r90 bottom value=0
R11 "DB" 0603 1453,1636.44 r90 bottom value=0
R12 "DB" 0603 1751,1634 r90 bottom value=0
R13 "" 0603 655,1808 r180 bottom value=470k
R14 "" 0603 955,1816 r180 bottom value=470k
R15 "" 0603 1251,1819 r180 bottom value=470k
R16 "" 0603 1545,1814 r180 bottom value=470k
R17 "DA" 0603 852,1722 r270 bottom value=0
R18 "DA" 0603 1152,1719 r270 bottom value=0
R19 "DA" 0603 1453,1725 r270 bottom value=0
R20 "DA" 0603 1748,1720 r270 bottom value=0
R21 "DB" 0603 855,1827 r270 bottom value=0
R22 "DB" 0603 1146,1830 r270 bottom value=0
R23 "DB" 0603 1451,1835 r270 bottom value=0
R24 "DB" 0603 1744,1819 r270 bottom value=0
R25 "Res" 0603 939,1761 r0 bottom value=0
R26 "Res" 0603 1240,1764 r0 bottom value=0
R27 "Res" 0603 1532,1757 r0 bottom value=0
R28 "Res" 0603 1818,1733 r0 bottom value=0
R29 "Res" 0603 861,1946 r0 bottom value=0
R30 "Res" 0603 1163,1941 r0 bottom value=0
R31 "Res" 0603 1463,1944 r0 bottom value=0
R32 "Res" 0603 1744,1940 r270 bottom value=0
R33 "Res" 0603 468,1567 r270 bottom value=0
R34 "Res" 0603 544,1867 r180 bottom value=0
R35 "Res" 0603 537,1727 r0 bottom value=0
R36 "Res" 0603 609,1692 r270 bottom value=0
R37 "Res" 0603 469,1647 r270 bottom value=0
R38 "Res" 0603 463,1852 r270 bottom value=10k
R39 "Res" 0603 462,1744 r270 bottom value=10k
R40 "Res" 0603 464,1941 r90 bottom value=0
R41 "Res" 0603 694,1813 r180 top value=0
R42 "Res" 0603 694,1762 r180 top value=0
R43 "Res" 0603 1753,2011 r90 top value=0
R44 "Res" 0603 610,1392 r270 top value=0
R45 "DNP" 0603 1687,1600 r180 top value=0
R46 "Res" 0603 1685,1661 r0 top value=0
R47 "Res" 0603 609,1575 r270 top value=0
R48 "Res" 0603 278,1181 r0 bottom value=47
R49 "Res" 0603 273,1132 r180 bottom value=0
R50 "Res" 0603 918.56,1290 r180 bottom value=0
R51 "Res" 0603 273,1080 r0 bottom value=DNP
R52 "Res" 0603 747,1115 r0 bottom value=1M
R53 "Res" 0603 823,1009 r90 bottom value=10M
R54 "Res" 0603 584,975 r270 bottom value=0
R55 "Res" 0603 590,894 r90 bottom value=1.37M
R56 "Res" 0603 600,293 r0 bottom value=0
R57 "Res" 0603 707,894 r180 bottom value=10M
R58 "Resistor" 0603 642,924 r270 bottom value=0
R59 "Res" 0603 601,342 r0 bottom value=0
R60 "Res" 0603 545,522 r0 bottom value=0
R61 "Res" 0603 410,523 r180 bottom value=0
R62 "Res" 0603 693,531 r270 bottom value=0
R63 "Res" 0603 472,476 r180 bottom value=0
R64 "Res" 0603 441,410 r90 bottom value=1M
R65 "Res" 0603 371,362 r90 bottom value=1M
R66 "Res" 0603 656,687 r180 bottom value=100k
R67 "Res" 0603 687,733 r0 bottom value=8.2M
R68 "Res" 0603 798,762 r90 bottom value=2.43M
R69 "Res" 0603 755,818 r90 bottom value=4.7M
R70 "Res" 0603 627.44,637 r180 bottom value=100k
R71 "Res" 0603 545,638 r180 bottom value=3.3M
R72 "Res" 0603 482,673 r90 bottom value=3.3M
R73 "DNP" 0603 412,652 r90 bottom value=0
R74 "Res" 0603 1234,576 r0 bottom value=0
R75 "Res" 0603 1480,702.47 r180 bottom value=0
R76 "Res" 0603 1600,863 r270 bottom value=0
R77 "Res" 0603 1483,1193 r180 bottom value=47k
R78 "Res" 0603 1613,1017 r270 bottom value=820k
R79 "DNP" 0603 1573,1213 r180 bottom value=0
R80 "Res" 0603 1166,923 r90 bottom value=0
R81 "Res" 0603 1613,1131 r270 bottom value=200k
R82 "Res" 0603 1232,867 r90 bottom value=TBD
R83 "Res" 0603 1213,978 r270 bottom value=47k
R84 "Res" 0603 1480,839 r0 bottom value=33k
R85 "Res" 0603 1381,794 r90 bottom value=47k
R86 "Res" 0603 1182,1060 r90 bottom value=1M
R87 "Res" 0603 671,413 r270 top value=0
R88 "Res" 0603 1282,305 r0 top value=0
R89 "Res" 0603 1313,463 r270 top value=10M
R90 "Res" 0603 871,474 r180 top value=10M
R91 "Res" 0603 1270,255 r0 top value=22
R92 "Res" 0603 1072,233 r270 top value=10k
R93 "Res" 0603 943,422 r270 top value=100k
R94 "Res" 0603 828,335 r270 top value=10k
R95 "Res" 0603 778,335 r270 top value=10k
R96 "Res" 0603 1115,809 r0 top value=10M
R97 "Res" 0603 1085,1247 r0 top value=47k
R98 "Res" 0603 952.44,1166 r0 top value=10M
R99 "Res" 0402 1912,975 r0 top value=0
R100 "Res" 0402 456,1689 r0 top value=560k
R101 "Res" 0402 381,1689 r0 top value=22k
R102 "Res" 0402 341,1650 r180 top value=220k
R103 "Res" 0603 589,1097 r270 top value=100k
R104 "Res" 0603 585,1177 r0 top value=1.5k
R105 "Res" 0603 258,1161 r90 top value=0
R106 "Res" 0603 773,1120 r270 top value=760k
R107 "Res" 0603 855,1126 r180 top value=240k
R108 "Res" 0603 1019,478 r270 bottom value=10M
R109 "Res" 0603 970,477.56 r90 bottom value=4.22M
R110 "Res" 0603 541,304 r270 top value=4.7k
R111 "Res" 0603 488,304 r270 top value=4.7k
R112 "Res" 0603 906,572 r270 top value=47k
R113 "Res" 0603 855,572 r270 top value=47k
R114 "Res" 0603 251,918 r90 top value=47k
R115 "Res" 0603 176,1400 r180 bottom value=10k
R116 "Res" 0603 396,1503 r0 bottom value=4.7M
R117 "Res" 0603 396,1550 r0 bottom value=4.7M
R118 "Res" 0603 396,1598 r0 bottom value=4.7M
R119 "Res" 0603 395,1645 r0 bottom value=4.7M
R120 "Res" 0603 316,1503 r180 bottom value=20M
R121 "Res" 0603 315,1550 r180 bottom value=20M
R122 "Res" 0603 314,1598 r180 bottom value=20M
R123 "Res" 0603 314,1645 r180 bottom value=20M
R124 "Res" 0603 1550,494 r0 bottom value=100k
R125 "Res" 0603 1562,569 r180 bottom value=10M
R126 "Res" 0603 1150.8,353 r270 bottom value=100k
R127 "Resistor" 0603 1003,261 r0 bottom value=330k
R128 "Resistor" 0603 804,298.8 r0 bottom value=0
R129 "Resistor" 0603 804,347.8 r0 bottom value=0
R130 "Res" 0603 688.24,321 r0 bottom value=DNP
R131 "Res" 0603 1437,308 r180 bottom value=10M
R132 "Res" 0603 3190,109 r90 top value=20M
R133 "Res" 0603 2350,109 r90 top value=20M
R134 "Res" 0603 2630,109 r90 top value=20M
R135 "Res" 0603 2910,109 r90 top value=20M
S1 "TrisolX" "TRICOLX - BASIC_V3_MIRROR_STRAIGHT_OR_IXYS" 648.25,1357.74 r0 top
S2 "TrisolX" "TRICOLX - BASIC_V3_MIRROR_STRAIGHT_OR_IXYS" 1715.19,2045.49 r180 top
U1 "MSP430FR5994" "48-QFN - ROUND PIN 1" 486.19,718.16 r180 top
U2 "CC2650F128RHBR" RHB0032E_NV 1331.1,1066.49 r180 top
U3 "ALD900xx" SOIC8 348,1827 r270 bottom
U4 "NCP301" SOT23-5 376,1130 r270 bottom value=3.0v
U5 "SIP32413" SC70-6 896,1074 r180 bottom
U6 "BU48" SOP4 647,1093 r0 bottom
U7 "BQ25504" VQFN-16 556.47,774.12 r270 bottom
U8 "BU49" SOP4 501,301 r0 bottom
U9 "BU49" SOP4 605,443 r0 bottom
U10 "TPS61200" VSON-10 1502.6,1073.94 r90 bottom
U11 "TPS22943DCKR" SC70-5 1475,768 r90 bottom
U12 "SIP32413" SC70-6 760,447 r90 top
U13 "SIP32413" SC70-6 1283,383 r90 top
U14 "APDS-9960" DFN_APDS_V2 955,248 r90 top
U15 "HMC5883L" SPARKFUN_16LPCC-DUP 1425,623 r90 top
U16 "LPS22HB" HLGA-10L 1507.6,376.2 r270 top
U17 "PCA9306" 8-VFSOP 660,325 r180 top
U18 "LSM6DS3" LGA-14 1243.21,616.71 r270 top
U19 "SIP32413" SC70-6 1234,791 r270 top
U20 "Comparator" SC70-5 434,1630 r90 top
U21 "SPU0414HR5H" SPU0414HR5H 376,1130 r270 top
U22 "MAX9914" SC70-5 702,1113 r180 top
U23 "TLV521" SC70-5 855,450 r270 bottom
U24 "FXL6408" 16-UMLP 1034,500 r180 top
U25 "ADS1115" VSSOP10 349,1419 r0 bottom
U26 "MCP4541" MSOP8 1003,342 r0 bottom
U27 "BU49" SOP4 1462,397 r0 bottom
U28 "REG710" SOT23-6 1341,430.24 r270 bottom value=2.7V
X1 "XTAL 4pin" "XTAL - 4Pin [2.5mm x 2.0mm]" 391,410 r90 top value=24Mhz
X2 "XTAL" "XTAL - 2Pin [3.2mm x 1.5mm]" 542,465 r0 top value=32.768kHz
Y1 "" "XTAL - 2Pin [3.2mm x 1.5mm]" 1608,1148 r90 top value=32.768kHz
Y2 "" "XTAL - 4Pin [2.5mm x 2.0mm]" 1472,859 r180 top value=24Mhz

## Footprints (in the part's own frame and the unit in brackets; to place one, negate y for a bottom-side part, rotate by r counter-clockwise, add the part's x,y. Pads: shape width x height; smd on the part's side, far side on the other; paste and mask are expansions set on the pad)
8-VFSOP [mm]
  rect 0.75x0.25 smd mask+0.05: 1(-1.55,0.75) 2(-1.55,0.25) 3(-1.55,-0.25) 4(-1.55,-0.75) 5(1.55,-0.75) 6(1.55,-0.25) 7(1.55,0.25) 8(1.55,0.75)
  silkscreen extent -1.2,-1.05 1.2,1.05, body extent -1.2,-1.05 1.2,1.05, height 1
16-UMLP [mm]
  rect 0.663x0.225 smd paste-0.025 mask+0.062: 1(0.717,-0.6)
  rect 0.563x0.225 smd paste-0.025 mask+0.062: 2(0.767,-0.2) 3(0.767,0.2) 4(0.767,0.6) 9(-0.767,0.6) 10(-0.767,0.2) 11(-0.767,-0.2) 12(-0.767,-0.6)
  rect 0.225x0.563 smd paste-0.025 mask+0.062: 5(0.6,1.169) 6(0.2,1.169) 7(-0.2,1.169) 8(-0.6,1.169) 13(-0.6,-1.168) 14(-0.2,-1.168) 15(0.2,-1.168) 16(0.6,-1.168)
  silkscreen extent -1.2,-1.63 1.22,1.63, body extent -0.9,-1.3 0.9,1.3, height 1
"48-QFN - ROUND PIN 1" [mm]
  rect 4x4 smd paste-10 mask-10: 0(0,0)
  oval 0.85x0.28 smd mask+0.07: 1(-3.475,2.75) 2(-3.475,2.25) 3(-3.475,1.75) 4(-3.475,1.25) 5(-3.475,0.75) 6(-3.475,0.25) 7(-3.475,-0.25) 8(-3.475,-0.75) 9(-3.475,-1.25) 10(-3.475,-1.75) 11(-3.475,-2.25) 12(-3.475,-2.75) 25(3.475,-2.75) 26(3.475,-2.25) 27(3.475,-1.75) 28(3.475,-1.25) 29(3.475,-0.75) 30(3.475,-0.25) 31(3.475,0.25) 32(3.475,0.75) 33(3.475,1.25) 34(3.475,1.75) 35(3.475,2.25) 36(3.475,2.75)
  oval 0.28x0.85 smd mask+0.07: 13(-2.75,-3.475) 14(-2.25,-3.475) 15(-1.75,-3.475) 16(-1.25,-3.475) 17(-0.75,-3.475) 18(-0.25,-3.475) 19(0.25,-3.475) 20(0.75,-3.475) 21(1.25,-3.475) 22(1.75,-3.475) 23(2.25,-3.475) 24(2.75,-3.475) 37(2.75,3.475) 38(2.25,3.475) 39(1.75,3.475) 40(1.25,3.475) 41(0.75,3.475) 42(0.25,3.475) 43(-0.25,3.475) 44(-0.75,3.475) 45(-1.25,3.475) 46(-1.75,3.475) 47(-2.25,3.475) 48(-2.75,3.475)
  Top Layer region: -2.575,2.25 -2.25,2.575 2.575,2.575 2.575,-2.575 -2.575,-2.575
  silkscreen extent -4.4,-3.5 3.5,3.65, body extent -3.5,-3.5 3.5,3.5, height 1
0402 [mm] "Surface Mount; Body 1 x 0.5 mm (LxW typ)"
  rect 0.5x0.6 smd: 1(-0.5,0) 2(0.5,0)
  body extent -0.5,-0.25 0.5,0.25, height 0.5
0603 [mm] "Surface Mount; Body 1.6 x 0.8 mm (LxW typ)"
  rect 0.6x0.9 smd: 1(-0.7,0) 2(0.7,0)
  body extent -0.8,-0.4 0.8,0.4, height 0.8
0805 [mm] "Surface Mount; Body 2.0 x 1.25 mm (LxW typ)"
  rect 0.7x1.3 smd: 1(-0.95,0) 2(0.95,0)
  body extent -1,-0.63 1,0.63, height 1.25
0805-W [mm] "Surface Mount - Wide; Body 2.0 x 1.25 mm (LxW typ)"
  rect 1.3x1.5 smd: 1(-0.95,0) 2(0.95,0)
  silkscreen extent -1.9,-0.65 -1.9,0.65, body extent -1,-0.62 1,0.63, height 1.25
CAP_CPH3225A [mm]
  rect 1.4x1 smd: 1(-1.15,0) 2(1.15,0)
  silkscreen extent -1.6,-1.25 1.6,1.25
CAP_ILLINOIS_DCN [mm] "Supercapacitor Radial Can"
  oct 1.1x1.1 hole 0.559: 1(-0.75,0)
  round 1.1 hole 0.559: 2(0.75,0)
  silkscreen extent -2,-2 2,2, body extent -2.05,-2 1.95,2, height 12.5
"COAX SMALL_V2" [mm] "MS-156HF"
  rect 0.55x0.7 smd: 1(0,1.225)
  rect 0.55x0.55 smd: 2(0,-1.525)
  rect 0.8x2.65 smd: 3(-1.075,-0.075) 4(1.075,-0.075)
  body extent -1.6,-1.93 1.62,1.73, height 1.6
DFN_APDS_V2 [mm] "DFN SMT 8 PIN"
  rect 0.6x0.7 smd paste+0 mask+0.05: 1(0.74,1.38)
  rect 0.6x0.72 smd paste+0 mask+0.05: 2(0.74,0.43) 3(0.74,-0.52) 4(0.74,-1.47)
  rect 0.6x0.72 smd mask+0.05: 5(-0.66,-1.47) 6(-0.66,-0.52) 7(-0.66,0.43) 8(-0.66,1.38)
  body extent -1.1,-2.16 1.23,2.03, height 1.35
DIOD-SOD-123-2_V [mm] "SOD-123, 2-Leads, Body 2.85x1.7mm (max), Pitch 3.7mm"
  rect 1.2x0.7 smd: 1(-1.85,0) 2(1.85,0)
  silkscreen extent -1.43,-0.85 1.97,1.03, body extent -1.42,-0.85 1.43,0.85, height 1.45
FIDUCIAL [mil] "1mm inner 2mm outer"
  Top Layer region: 0,-39.37 -15.07,-36.37 -27.84,-27.84 -36.37,-15.07 -39.37,0 -39.37,0 -36.37,15.07 -27.84,27.84 -15.07,36.37 0,39.37 0,39.37 15.07,36.37 27.84,27.84 36.37,15.07 39.37,0 39.37,0 36.37,-15.07 27.84,-27.84 15.07,-36.37 0,-39.37
HLGA-10L [mm] "LPS22HB digital MEMS nano pressure sensor"
  rect 0.375x0.345 smd paste-0.015 mask+0.05: 1(-0.763,0.25) 2(-0.763,-0.25) 6(0.763,-0.25) 7(0.763,0.25)
  rect 0.345x0.375 smd paste-0.015 mask+0.05: 3(-0.5,-0.763) 4(0,-0.763) 5(0.5,-0.763) 8(0.5,0.763) 9(0,0.763) 10(-0.5,0.763)
  silkscreen extent -1.36,-1 1,1, body extent -1,-1 1,1, height 0.8
IIF_INV [mm] "PCB antenna flipped"
  rect 0.46x0.46 smd paste-10 mask-10: 1(-10.86,0.23) 2(-9.95,0.23) 3(-7.75,0.23)
  Top Layer region: -10.63,0 -11.09,0 -11.09,2.13 -9.993,3.527 -9.708,3.242 -10.63,2.03
  Top Layer region: 0,6.91 -25.58,6.91 -25.58,5.7 -9.18,5.7 -9.18,3.9 -10.18,3.9 -10.18,2.69 -6.98,2.69 -6.98,3.9 -7.98,3.9 -7.98,4.7 -2.18,4.7 -2.18,2.03 -10.18,2.03 -10.18,0 -9.18,0 -9.18,0.74 -7.98,0.74 -7.98,0 -6.98,0 -6.98,0.74 0,0.74
JTAG_V3 [mm]
  round 1 hole 0.6: 1(-2.54,-0.635) 2(-2.54,0.635) 3(-1.27,-0.635) 4(-1.27,0.635) 5(0,-0.635) 6(0,0.635) 7(1.27,-0.635) 8(1.27,0.635) 9(2.54,-0.635) 10(2.54,0.635)
  silkscreen extent -3.89,-2.54 3.17,2.54
JUMPER0603 [mm] "Surface Mount; Body 1.6 x 0.8 mm (LxW typ)"
  rect 0.6x0.9 smd: 1(-0.7,0) 2(0.7,0)
  body extent -0.8,-0.4 0.8,0.4, height 0.8
LGA-14 [mm]
  rect 0.35x0.25 smd mask+0.07: 1(-1.225,0.75)
  rect 0.45x0.25 smd mask+0.07: 2(-1.175,0.25) 3(-1.175,-0.25) 4(-1.175,-0.75) 8(1.175,-0.75) 9(1.175,-0.25) 10(1.175,0.25) 11(1.175,0.75)
  rect 0.25x0.45 smd mask+0.07: 5(-0.5,-0.925) 6(0,-0.925) 7(0.5,-0.925) 12(0.5,0.925) 13(0,0.925) 14(-0.5,0.925)
  Top Layer region: -1.05,0.875 -0.95,0.775 -0.95,0.625 -1.05,0.625
  silkscreen extent -1.93,-1.25 1.5,1.25, body extent -1.5,-1.25 1.5,1.25, height 0.86
MHDR1X2 [mm] "Connector; Header; 2 Position"
  rect 1x1 hole 0.6: 1(0,0)
  round 1 hole 0.6: 2(1.27,0)
  silkscreen extent -0.9,-0.9 2.17,0.9
MHDR1X3 [mm] "Connector; Header; 3 Position"
  rect 1x1 hole 0.6: 1(0,0)
  round 1 hole 0.6: 2(1.27,0) 3(2.54,0)
  silkscreen extent -0.9,-0.9 3.44,0.9
MHDR1X4 [mm] "Connector; Header; 4 Position"
  rect 1x1 hole 0.6: 1(0,0)
  round 1 hole 0.6: 2(1.27,0) 3(2.54,0) 4(3.81,0)
  silkscreen extent -0.9,-0.9 4.71,0.9
MHDR1X6 [mm] "Connector; Header; 6 Position"
  rect 1x1 hole 0.6: 1(0,0)
  round 1 hole 0.6: 2(1.27,0) 3(2.54,0) 4(3.81,0) 5(5.08,0) 6(6.35,0)
  silkscreen extent -0.9,-0.9 7.25,0.9
MHDR1X7 [mm] "Connector; Header; 7 Position"
  rect 1x1 hole 0.6: 1(0,0)
  round 1 hole 0.6: 2(1.27,0) 3(2.54,0) 4(3.81,0) 5(5.08,0) 6(6.35,0) 7(7.62,0)
  silkscreen extent -0.9,-0.9 8.52,0.9
MHDR1X8 [mm] "Connector; Header; 8 Position"
  rect 1x1 hole 0.6: 1(0,0)
  round 1 hole 0.6: 2(1.27,0) 3(2.54,0) 4(3.81,0) 5(5.08,0) 6(6.35,0) 7(7.62,0) 8(8.89,0)
  silkscreen extent -0.9,-0.9 9.79,0.9
MHDR2X6 [mil]
  round 40 hole 24 paste+0 mask+0: 1(-125,25) 2(-125,-25) 3(-75,25) 4(-75,-25) 5(-25,25) 6(-25,-25) 7(25,25) 8(25,-25) 9(75,25) 10(75,-25) 11(125,25) 12(125,-25)
  silkscreen extent -160,-60 160,60
MHDR2X8 [mil]
  rect 40x40 hole 24 paste+0 mask+0: 1(-175,25)
  round 40 hole 24 paste+0 mask+0: 2(-175,-25) 3(-125,25) 4(-125,-25) 5(-75,25) 6(-75,-25) 7(-25,25) 8(-25,-25) 9(25,25) 10(25,-25) 11(75,25) 12(75,-25) 13(125,25) 14(125,-25) 15(175,25) 16(175,-25)
  silkscreen extent -210,-60 210,60
MHDR2X12 [mil]
  rect 40x40 hole 24 paste+0: 1(-275,25)
  round 40 hole 24 paste+0: 2(-275,-25) 3(-225,25) 4(-225,-25) 5(-175,25) 6(-175,-25) 7(-125,25) 8(-125,-25) 9(-75,25) 10(-75,-25) 11(-25,25) 12(-25,-25) 13(25,25) 14(25,-25) 15(75,25) 16(75,-25) 17(125,25) 18(125,-25) 19(175,25) 20(175,-25) 21(225,25) 22(225,-25) 23(275,25) 24(275,-25)
  silkscreen extent -310,-60 310,60
MMCX-TH [mil] "MMCX Molex TH 734151001"
  round 52 hole 33: 1(0,0)
  round 60 hole 33: 2(-50,50) 2(-50,-50) 2(50,50) 2(50,-50)
  silkscreen extent -70,-70 70,70, body extent -70,-70 70,70, height 142
MSOP8 [mm]
  rect 1.45x0.45 smd mask+0.05: 1(-2.2,0.975) 2(-2.2,0.325) 3(-2.2,-0.325) 4(-2.2,-0.975) 5(2.2,-0.975) 6(2.2,-0.325) 7(2.2,0.325) 8(2.2,0.975)
  silkscreen extent -1.5,-1.5 1.5,1.5, body extent -1.5,-1.5 1.5,1.5, height 2
PFL1609 [mil]
  rect 25x40 smd: 1(-25,0) 2(25,0)
  silkscreen extent -38,-21 38,21, body extent -36,-21 36,21, height 37
RHB0032E_NV [mm]
  oval 0.6x0.24 smd paste+0 mask+0.051: 1(-2.4,1.75) 2(-2.4,1.25) 3(-2.4,0.75) 4(-2.4,0.25) 5(-2.4,-0.25) 6(-2.4,-0.75) 7(-2.4,-1.25) 8(-2.4,-1.75) 17(2.4,-1.75) 18(2.4,-1.25) 19(2.4,-0.75) 20(2.4,-0.25) 21(2.4,0.25) 22(2.4,0.75) 23(2.4,1.25) 24(2.4,1.75)
  oval 0.24x0.6 smd paste+0 mask+0.051: 9(-1.75,-2.4) 10(-1.25,-2.4) 11(-0.75,-2.4) 12(-0.25,-2.4) 13(0.25,-2.4) 14(0.75,-2.4) 15(1.25,-2.4) 16(1.75,-2.4) 25(1.75,2.4) 26(1.25,2.4) 27(0.75,2.4) 28(0.25,2.4) 29(-0.25,2.4) 30(-0.75,2.4) 31(-1.25,2.4) 32(-1.75,2.4)
  rect 3.45x3.45 smd paste-1.712 mask+0.051: 33(0,0)
  silkscreen extent -2.72,-2.73 2.72,2.73, body extent -2.54,-2.54 2.54,2.54, height 1
SC70-5 [mm] "SC70-5"
  rect 0.4x0.92 smd: 1(-0.65,-0.95) 2(0,-0.95) 3(0.65,-0.95) 4(0.65,0.95) 5(-0.65,0.95)
  silkscreen extent -0.9,-0.4 0.9,0.4, body extent -0.9,-0.4 0.9,0.4, height 1.1
SC70-6 [mm] "SC70-6"
  rect 0.4x0.92 smd: 1(-0.65,-0.95) 2(0,-0.95) 3(0.65,-0.95) 4(0.65,0.95) 5(0,0.95) 6(-0.65,0.95)
  silkscreen extent -1.2,-0.71 0.9,0.4, body extent -0.9,-0.4 0.9,0.4, height 1.1
SOD-523 [mm] "SOD-523 Footprint"
  rect 0.5x0.5 smd: 1(0,-0.7) 2(0,0.7)
  silkscreen extent -0.4,0.3 0.4,0.6, body extent -0.4,-0.6 0.4,0.6, height 1
SOIC8 [mm]
  rect 1.55x0.6 smd: 1(-2.7,1.905) 2(-2.7,0.635) 3(-2.7,-0.635) 4(-2.7,-1.905) 5(2.7,-1.905) 6(2.7,-0.635) 7(2.7,0.635) 8(2.7,1.905)
  silkscreen extent -2,-2.54 2,2.54, body extent -2.03,-2.54 2.03,2.54, height 2
SOP4 [mm] "SOP4"
  rect 0.6x0.8 smd: 1(-0.65,-0.95) 3(0.65,0.95) 4(-0.65,0.95)
  rect 0.8x0.8 smd: 2(0.65,-0.95)
  silkscreen extent -1.55,-0.7 1.15,0.7, body extent -1.1,-0.7 1.15,0.7, height 1
"SOT23 - N" [mm] "SOT23, 3-Leads, Body 2.9x1.3mm, Pitch 0.95mm, Lead Span 2.3mm - Reverse Pinning, IPC Medium Density"
  rect 1.15x0.6 smd: 1(-1.125,0.95) 2(-1.125,-0.95) 3(1.125,0)
  silkscreen extent -0.2,-1.5 0.7,1.5, body extent -0.7,-1.5 0.7,1.5, height 1.1
SOT23-5 [mm]
  rect 1x0.7 smd: 1(-1.2,0.95) 2(-1.2,0) 3(-1.2,-0.95) 4(1.2,-0.95) 5(1.2,0.95)
  silkscreen extent -0.75,-1.5 0.75,1.5, body extent -0.75,-1.5 0.75,1.48, height 1
SOT23-6 [mm]
  rect 1x0.7 smd: 1(-1.2,0.95) 2(-1.2,0) 3(-1.2,-0.95) 4(1.2,-0.95) 5(1.2,0) 6(1.2,0.95)
  silkscreen extent -0.75,-1.5 0.75,1.5, body extent -0.75,-1.5 0.75,1.48, height 1
SOT-143 [mm] "SOT-143"
  rect 1.2x0.9 smd: 1(-0.8,-1)
  rect 0.8x0.9 smd: 2(1,-1) 3(1,1) 4(-1,1)
  silkscreen extent -1.5,-0.7 1.5,0.7, body extent -1.5,-0.7 1.5,0.7, height 1.1
"SOT-323, HSMS-285C" [mm] "SOT-323/SC-70; 3 Leads; HSMS-285C"
  rect 0.7x1 smd: 1(-0.65,-1.025) 2(0.65,-1.025) 3(0,1.025)
  silkscreen extent -1.07,-0.65 1.07,0.65, body extent -1.07,-0.65 1.07,0.65, height 1
SOT-523-3 [mm] "SOT-523-3 1.7x0.98mm body"
  rect 0.5x0.66 smd: 1(-0.5,-0.57) 2(0.5,-0.57) 3(0,0.57)
  silkscreen extent -0.8,-0.4 0.8,0.4, body extent -0.8,-0.4 0.8,0.4, height 0.6
SPARKFUN_16LPCC-DUP [mil]
  rect 26x12 smd: 1(-53.94,30) 2(-53.94,10) 3(-53.94,-9.84) 4(-53.94,-29.53) 9(54,-29.53) 10(54,-9.84) 11(54,10) 12(54,30)
  rect 12x26 smd: 5(-29.53,-53.94) 6(-9.84,-53.94) 7(10,-53.94) 8(30,-53.94) 13(30,54) 14(10,54) 15(-9.84,54) 16(-29.53,54)
  silkscreen extent -67,-67 67,67, body extent -59,-59 59,59, height 35
SPU0414HR5H [mm] "Knowles MEMS Mic Analog Top"
  round 0.8 smd: 1(0.85,1.23) 2(0.85,-1.23) 3(-0.85,-1.23) 4(-0.85,1.23)
  silkscreen extent -1.5,-1.9 1.5,1.9, body extent -1.5,-1.9 1.5,1.9, height 1.2
SUPERCAP_DMHA14R [mm] "Murata dual supercap 20x20x0.4mm"
  rect 2.6x2 smd paste-0.25: 1(13,6) 2(13,2.5) 3(13,-2.5) 4(13,-6)
  silkscreen extent 12.46,-7.62 13.57,8.24, body extent 11.63,-7 14.38,7, height 2
SUPERCAP_DMT [mm] "Murata dual supercap 21x14x2.2mm"
  rect 1.6x1.9 smd paste-0.2: 1(11.25,3.6) 2(11.25,0) 3(11.25,-3.6)
  body extent 10.38,2.75 12,4.75, height 2
"TRICOLX - BASIC_V3_MIRROR_STRAIGHT_OR_IXYS" [mm] "TrisolX Solar Wings"
  rect 3x6 smd paste-10: 1(23,3.6) 3(2,3.6)
  rect 5x5 smd paste-25: 1(25.5,2.5)
  rect 1x2 smd paste-2: 2(-0.95,2.951)
  Top Layer region: 0,0 3.5,0 3.5,8.5 0,8.5
  Top Layer region: 5,0 7,0 7,8.5 5,8.5
  Top Layer region: 11,0 13,0 13,8.5 11,8.5
  Top Layer region: 17,0 19,0 19,6.5 17,6.5
  Top Layer region: 5,6.5 14.5,6.5 14.5,8.5 5,8.5
  Top Layer region: 5,0 27.3,0 27.3,2 5,2
  Top Layer region: 13.803,6.62 24.035,2.896 24.719,4.776 14.487,8.5
  silkscreen extent -0.25,0 27.35,8.5, body extent -1.5,0 27.3,8.5, height 2
VQFN-16 [mm] "QFN, 16-Leads, Body 3x3mm, Pitch 0.5mm, Thermal Pad 1.65x1.65mm"
  rrect40% 0.6x0.25 smd: 1(-1.4,0.75) 2(-1.4,0.25) 3(-1.4,-0.25) 4(-1.4,-0.75) 9(1.4,-0.75) 10(1.4,-0.25) 11(1.4,0.25) 12(1.4,0.75)
  rrect40% 0.25x0.6 smd: 5(-0.75,-1.4) 6(-0.25,-1.4) 7(0.25,-1.4) 8(0.75,-1.4) 13(0.75,1.4) 14(0.25,1.4) 15(-0.25,1.4) 16(-0.75,1.4)
  rrect6% 1.7x1.7 smd paste-2: 17(0,0)
  silkscreen extent -2.35,-1.57 1.57,1.58, body extent -1.5,-1.5 1.5,1.5, height 1
VSON-10 [mm] "SON, 10-Leads, Body 3x3mm, Pitch 0.5mm, Thermal Pad 2.4x1.65mm, TI Recommended"
  rrect36% 0.85x0.28 smd paste-0.025 mask+0.07: 1(-1.475,1) 2(-1.475,0.5) 3(-1.475,0) 4(-1.475,-0.5) 5(-1.475,-1) 6(1.475,-1) 7(1.475,-0.5) 8(1.475,0) 9(1.475,0.5) 10(1.475,1)
  rrect6% 1.65x2.4 smd paste-0.825 mask+0.07: 11(0,0)
  Top Layer region: -0.39,-1.092 -0.11,-1.092 -0.11,-1.9 -0.39,-1.9
  Top Layer region: 0.39,-1.9 0.11,-1.9 0.11,-1.067 0.39,-1.067
  Top Layer region: 0.39,1.041 0.11,1.041 0.11,1.9 0.39,1.9
  Top Layer region: -0.39,1.9 -0.11,1.9 -0.11,1.041 -0.39,1.041
  silkscreen extent -2.15,-1.7 1.7,1.7, body extent -1.55,-1.55 1.55,1.55, height 1
VSSOP10 [mm]
  rect 1.45x0.3 smd paste+0 mask+0.05: 1(-2.2,1) 2(-2.2,0.5) 3(-2.2,0) 4(-2.2,-0.5) 5(-2.2,-1) 6(2.2,-1) 7(2.2,-0.5) 8(2.2,0) 9(2.2,0.5) 10(2.2,1)
  silkscreen extent -1.5,-1.5 1.5,1.5, body extent -1.5,-1.5 1.5,1.5, height 2
"XTAL - 2Pin [3.2mm x 1.5mm]" [mm] "FC-135   crystal - epson eletronics"
  rect 1x1.8 smd: 1(-1.25,0) 2(1.25,0)
  silkscreen extent -0.76,-0.76 0.76,0.76, body extent -1.6,-0.75 1.6,0.75, height 0.8
"XTAL - 4Pin [2.5mm x 2.0mm]" [mm] "CRYSTAL, 2.5mm x 2.0mm,  4Pin"
  rect 1.2x1 smd: 1(-0.85,-0.65) 2(0.85,-0.65) 3(0.85,0.65) 4(-0.85,0.65)
  silkscreen extent -1.7,-1 1.25,1

## Part data
C1 C2 C3 C4 C5 C6 C7 C8 C9 C10 C11 C12 C13 C14: "Polarized Capacitor", Digi-Key Part Number=728-1083-1-ND, Distributor Part Number=628-CPX3225A752D, Manufacturer="Seiko Instruments", Manufacturer Part Number=CPX3225A752D, Rating=2.6V, Distributor=Mouser, Mouser Part Number=628-CPX3225A752D, Note=OPT
C15 C16 C17 C18 C19: library part SUPERCAP, "EDLC Supercap", Digi-Key Part Number=1572-1250-ND, Distributor Part Number=598-304DCN2R7SCBB, Manufacturer="Illinois Capacitor / CDE", Rating=2.7V, Distributor=Mouser, Manufacturer Part Number=304DCN2R7SCBB, Mouser Part Number=598-304DCN2R7SCBB, Note=OPT
C20: "EDLC Supercap Dual with Balancing Terminal", Digi-Key Part Number=490-13208-ND, Distributor Part Number=81-DMT3N4R2U224M3DT0, Manufacturer="Murata Electronics", Manufacturer Part Number=DMT3N4R2U224M3DTA0, Rating=4.2/2.1V, Distributor=Mouser, Mouser Part Number=81-DMT3N4R2U224M3DT0, Note=OPT
C21: "EDLC Supercap Dual", Digi-Key Part Number=490-17331-ND, Distributor Part Number=81-DMHA14R5V353M4ATA, Manufacturer="Murata Electronics", Manufacturer Part Number=DMHA14R5V353M4ATA0, Rating=4.5/2.25V, Distributor=Mouser, Mouser Part Number=81-DMHA14R5V353M4ATA, Note=OPT
C22 C23 C24 C25 C59 C60 C82 C96 C107: "Ceramic Capacitor (Surface Mount)", Distributor Part Number=490-1543-1-ND, Manufacturer="Murata Electronics North America", Manufacturer Part Number=GRM188R61A105KA61D, Distributor=Digi-Key
C26 C33 C35 C39 C43 C49 C50 C62 C64 C67 C68 C74 C75 C76 C77 C78 C102 C112 C113 C115 C117: "Ceramic Capacitor (Surface Mount)", Distributor Part Number=490-1532-1-ND, Manufacturer="Murata Electronics North America", Manufacturer Part Number=GRM188R71C104KA01D, Distributor=Digi-Key
C27 C28 C32 C37 C42 C55 C56 C57 C58 C71 C72 C104 C118 C120 C121: "Ceramic Capacitor (Surface Mount)", Distributor Part Number=490-3296-1-ND, Manufacturer="Murata Electronics North America", Manufacturer Part Number=GRM188R61C225KE15D, Distributor=Digi-Key
C29: "Ceramic Capacitor (Surface Mount)", Distributor Part Number=490-13981-1-ND, Manufacturer="Murata Electronics North America", Manufacturer Part Number=GRM21BR60J107ME15L, Rating=6.3V, Distributor=Digi-Key, Note=DNP, PurchaseNote="47uF 587-3266-1-ND"
C30 C31 C40: "Ceramic Capacitor (Surface Mount)", Manufacturer="Murata Electronics North America", Manufacturer Part Number=GRM21BR60G107ME15L, Mouser Part Number=81-GRM21BR60G107ME5L, Rating=6.3V, Distributor=Mouser
  C30 C31: PurchaseNote="47uF 587-3266-1-ND"
C34 C63 C103: "Ceramic Capacitor (Surface Mount)", Distributor Part Number=1276-2087-1-ND, Manufacturer="Samsung Electro-Mechanics", Manufacturer Part Number=CL10B475KQ8NQNC, Distributor=Digi-Key
C36 C66 C119: "Ceramic Capacitor (Surface Mount)", Distributor Part Number=490-3290-1-ND, Manufacturer="Murata Electronics North America", Manufacturer Part Number=GRM188R71E224KA88D, Distributor=Digi-Key
C38: "Ceramic Capacitor (Surface Mount)", Distributor Part Number=1276-6528-1-ND, Manufacturer="Samsung Electro-Mechanics", Manufacturer Part Number=CL10A476MR8NZNE, Distributor=Digi-Key
C41: "Ceramic Capacitor (Surface Mount)", Distributor Part Number=490-6340-1-ND, Manufacturer="Murata Electronics North America", Manufacturer Part Number=GRM155R71E103JA01J, Rating="X7R, 10%", Distributor=Digi-Key
C44 C45 C51 C52 C53: "Ceramic Capacitor (Surface Mount)", Manufacturer="Murata Electronics North America", Manufacturer Part Number=GRM21BR60G107ME15L, Mouser Part Number=81-GRM21BR60G107ME5L, Distributor=Mouser
  C44: Note=DNP, PurchaseNote="or CL10A476MR8NZNE 4.0V 0.8mm"
  C45: PurchaseNote="or CL10A476MR8NZNE 4.0V 0.8mm"
  C51 C53: Note=DNP
C46 C73 C79: "Ceramic Capacitor (Surface Mount)", Distributor Part Number=490-3896-1-ND, Manufacturer="Murata Electronics North America", Manufacturer Part Number=GRM188R60J106ME47D, Distributor=Digi-Key
C47: "Ceramic Capacitor (Surface Mount)", Distributor Part Number=490-10748-1-ND, Manufacturer="Murata Electronics North America", Manufacturer Part Number=GRM21BR61E106MA73L, Distributor=Digi-Key, Note=DNP
C48 C88 C89: "Ceramic Capacitor (Surface Mount)", Manufacturer="Generic Ceramic Chip Cap (TBD)", Note=DNP
C54: "Ceramic Capacitor (Surface Mount)", Distributor Part Number=1276-1984-1-ND, Manufacturer="Samsung Electro-Mechanics", Manufacturer Part Number=CL10B203KB8NNNC, Distributor=Digi-Key
C61: "Polarized Capacitor", Manufacturer="Murata Electronics North America", Manufacturer Part Number=GRM21BR60G107ME15L, Mouser Part Number=81-GRM21BR60G107ME5L, Distributor=Mouser
C65: "CAP CER 4.7UF 4V X6S", Distributor Part Number=1276-2087-1-ND, Manufacturer="Samsung Electro-Mechanics", Manufacturer Part Number=CL10B475KQ8NQNC, Distributor=Digi-Key
C69 C70 C101 C105: "Ceramic Capacitor (Surface Mount)", Distributor Part Number=399-1061-1-ND, Manufacturer=Kemet, Manufacturer Part Number=C0603C101J5GACTU, Distributor=Digi-Key
C80 C81: "Ceramic Capacitor (Surface Mount)", Distributor Part Number=581-04025A100MAT2A, Manufacturer=AvX, Manufacturer Part Number=04025A100MAT2A, Distributor=Mouser
C83 C84: "Ceramic Capacitor (Surface Mount)", Distributor Part Number=490-8222-1-ND, Manufacturer="Murata Electronics North America", Manufacturer Part Number=GRM1555C1H6R0CA01D, Distributor=Digi-Key
C85 C114: "Ceramic Capacitor (Surface Mount)", Distributor Part Number=490-1459-1-ND, Manufacturer="Murata Electronics North America", Manufacturer Part Number=GRM1885C1H222JA01D, Distributor=Digi-Key
  C114: Note=DNP?
C86 C87 C90 C92 C99: "Ceramic Capacitor (Surface Mount)", Digi-Key Part Number=712-1266-1-ND, Distributor Part Number=490-6073-1-ND, Manufacturer="Murata Electronics", Manufacturer Part Number=GJM1555C1H1R0BB01D, Distributor=Digi-Key
  C86 C87 C90 C92: Note=DNP
C91: "Ceramic Capacitor (Surface Mount)", Distributor Part Number=490-6263-1-nd, Manufacturer="Murata Electronics", Distributor=Digikey, Note=0.5pF
C93 C94 C97: "Ceramic Capacitor (Surface Mount)", Digi-Key Part Number=712-1298-1-ND, Distributor Part Number=609-500R07S330JV4T, Manufacturer=Johanson, Manufacturer Part Number=500R07S330JV4T, Distributor=Mouser, Mouser Part Number=609-500R07S330JV4T
C95: "Ceramic Capacitor (Surface Mount)", Digi-Key Part Number=712-1289-1-ND, Distributor Part Number=609-500R07S5R6CV4T, Manufacturer=Johanson, Manufacturer Part Number=500R07S5R6CV4T, Distributor=Mouser, Mouser Part Number=609-500R07S5R6CV4T
C98: "Ceramic Capacitor (Surface Mount)", Digi-Key Part Number=712-1253-1-ND, Distributor Part Number=609-500R07S100JV4T, Manufacturer=Johanson, Manufacturer Part Number=500R07S100JV4T, Distributor=Mouser, Mouser Part Number=609-500R07S100JV4T
C100: "Ceramic Capacitor (Surface Mount)", Digi-Key Part Number=490-3244-1-ND, Distributor Part Number=81-GRM1555C1H102JA1D, Manufacturer="Generic Ceramic Chip Cap (TBD)", Manufacturer Part Number=GRM1555C1H102JA01D, Distributor=Mouser, Mouser Part Number=81-GRM1555C1H102JA1D
C106: "Ceramic Capacitor (Surface Mount)", Distributor Part Number=445-5192-1-ND, Manufacturer="TDK Corporation", Manufacturer Part Number=C1608X7R1C474K080AC, Distributor=Digi-Key
C108 C109: "Ceramic Capacitor (Surface Mount)", Distributor Part Number=490-5867-1-ND, Manufacturer="Murata Electronics North America", Manufacturer Part Number=GRM1555C1H8R0DA01D, Distributor=Digi-Key
C110 C111: "Ceramic Capacitor (Surface Mount)", Distributor Part Number=490-5873-1-ND, Manufacturer="Murata Electronics North America", Manufacturer Part Number=GRM1555C1H4R0CA01D, Distributor=Digi-Key
C116: "Ceramic Capacitor (Surface Mount)", Distributor Part Number=490-3287-1-ND, Manufacturer="Murata Electronics North America", Manufacturer Part Number=GRM188R71H473KA61D, Distributor=Digi-Key
CO1: "ms-156hf", Distributor Part Number=798-MS156HF20, Manufacturer="Hirose Connector", Manufacturer Part Number=MS-156HF(20), Distributor=Mouser, Mouser Part Number=798-MS156HF20
D1 D2 D3 D4 D5 D6 D7 D8 D9 D10 D11 D12 D13 D14 D15 D16 D17 D18 D19 D20 D21 D22 D23 D24 D25 D26 D27 D29 D30 D31 D32 D33 D34 D35 D36 D39 D40: "General Purpose Diode", Digi-Key Part Number=BAS40-02V-V-G-08GICT-ND, Distributor Part Number=78-BAS40-02V-V-G-08, Manufacturer="Vishay Semiconductor", Manufacturer Part Number=BAS40-02V-V-G-08, Distributor=Mouser, Mouser Part Number=78-BAS40-02V-V-G-08
  D29: Note=DNP
D28: library part CMP-0303-00003-1, "1.0 A Surface Mount Schottky Barrier Rectifier, 40 V, -65 to 125 degC, 2-Pin SOD-123 Package, RoHS, Tape and Reel", Digi-Key Part Number=MMSZ4683-TPMSCT-ND, Manufacturer="Micro Commercial Co", Manufacturer Part Number=MMSZ4683-TP, Note=DNP, PackageDescription="2-Pin SOD-123, Body 2.7 x 1.55 mm, Pitch 3.7 mm", PackageReference=SOD-123-2
D37 D38: "Agilent Schottky Diode, Two in Series, Small Package SOT-323", Digi-Key Part Number=516-2558-ND, Distributor Part Number=630-HSMS-285C-BLKG, Manufacturer="Avago Technologies US Inc.", Manufacturer Part Number=HSMS-285C-BLKG, Distributor=Mouser, Mouser Part Number=630-HSMS-285C-BLKG
FB1 FB2: "Ferrite bead, RF choke", Digi-Key Part Number=490-5216-1-ND, Manufacturer="Murata Electronics North America", Manufacturer Part Number=BLM18HE152SN1D, Distributor=Digikey, Distributor Part Number=490-5216-1-ND